# Allegro board LIDAR_READOUT_VER1_2_temp.brd
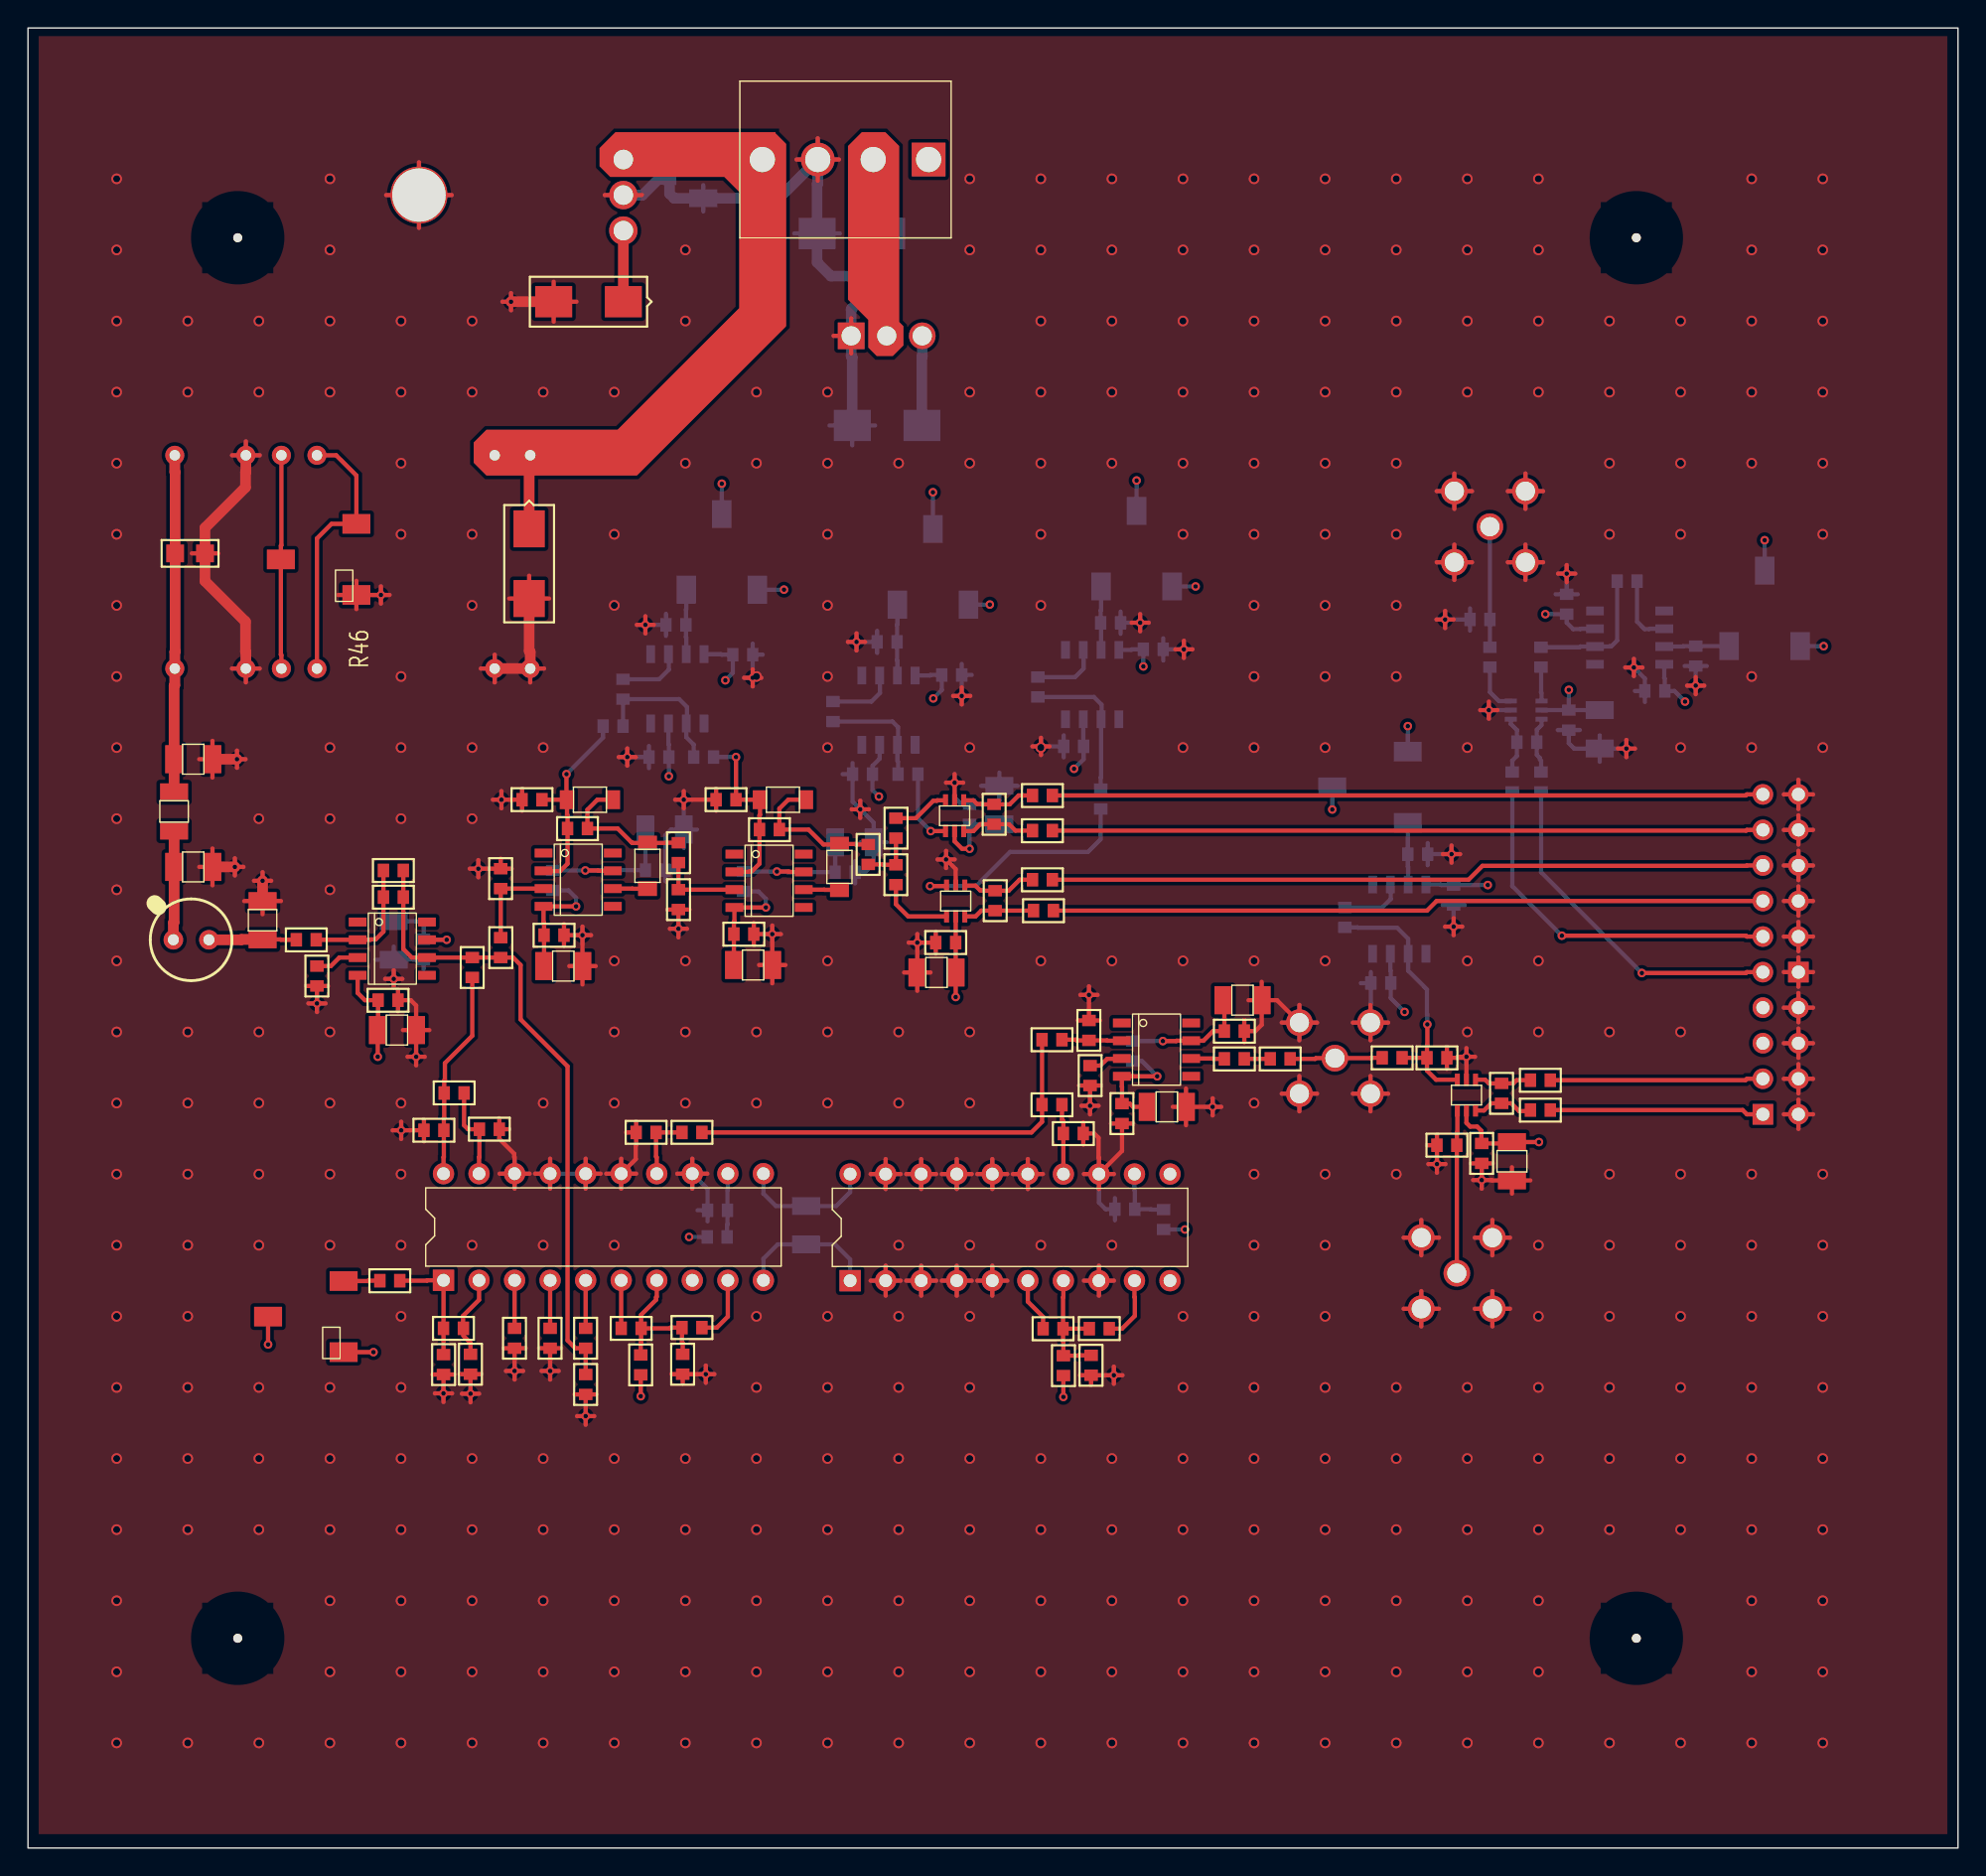
[diagram p0: board, top side]
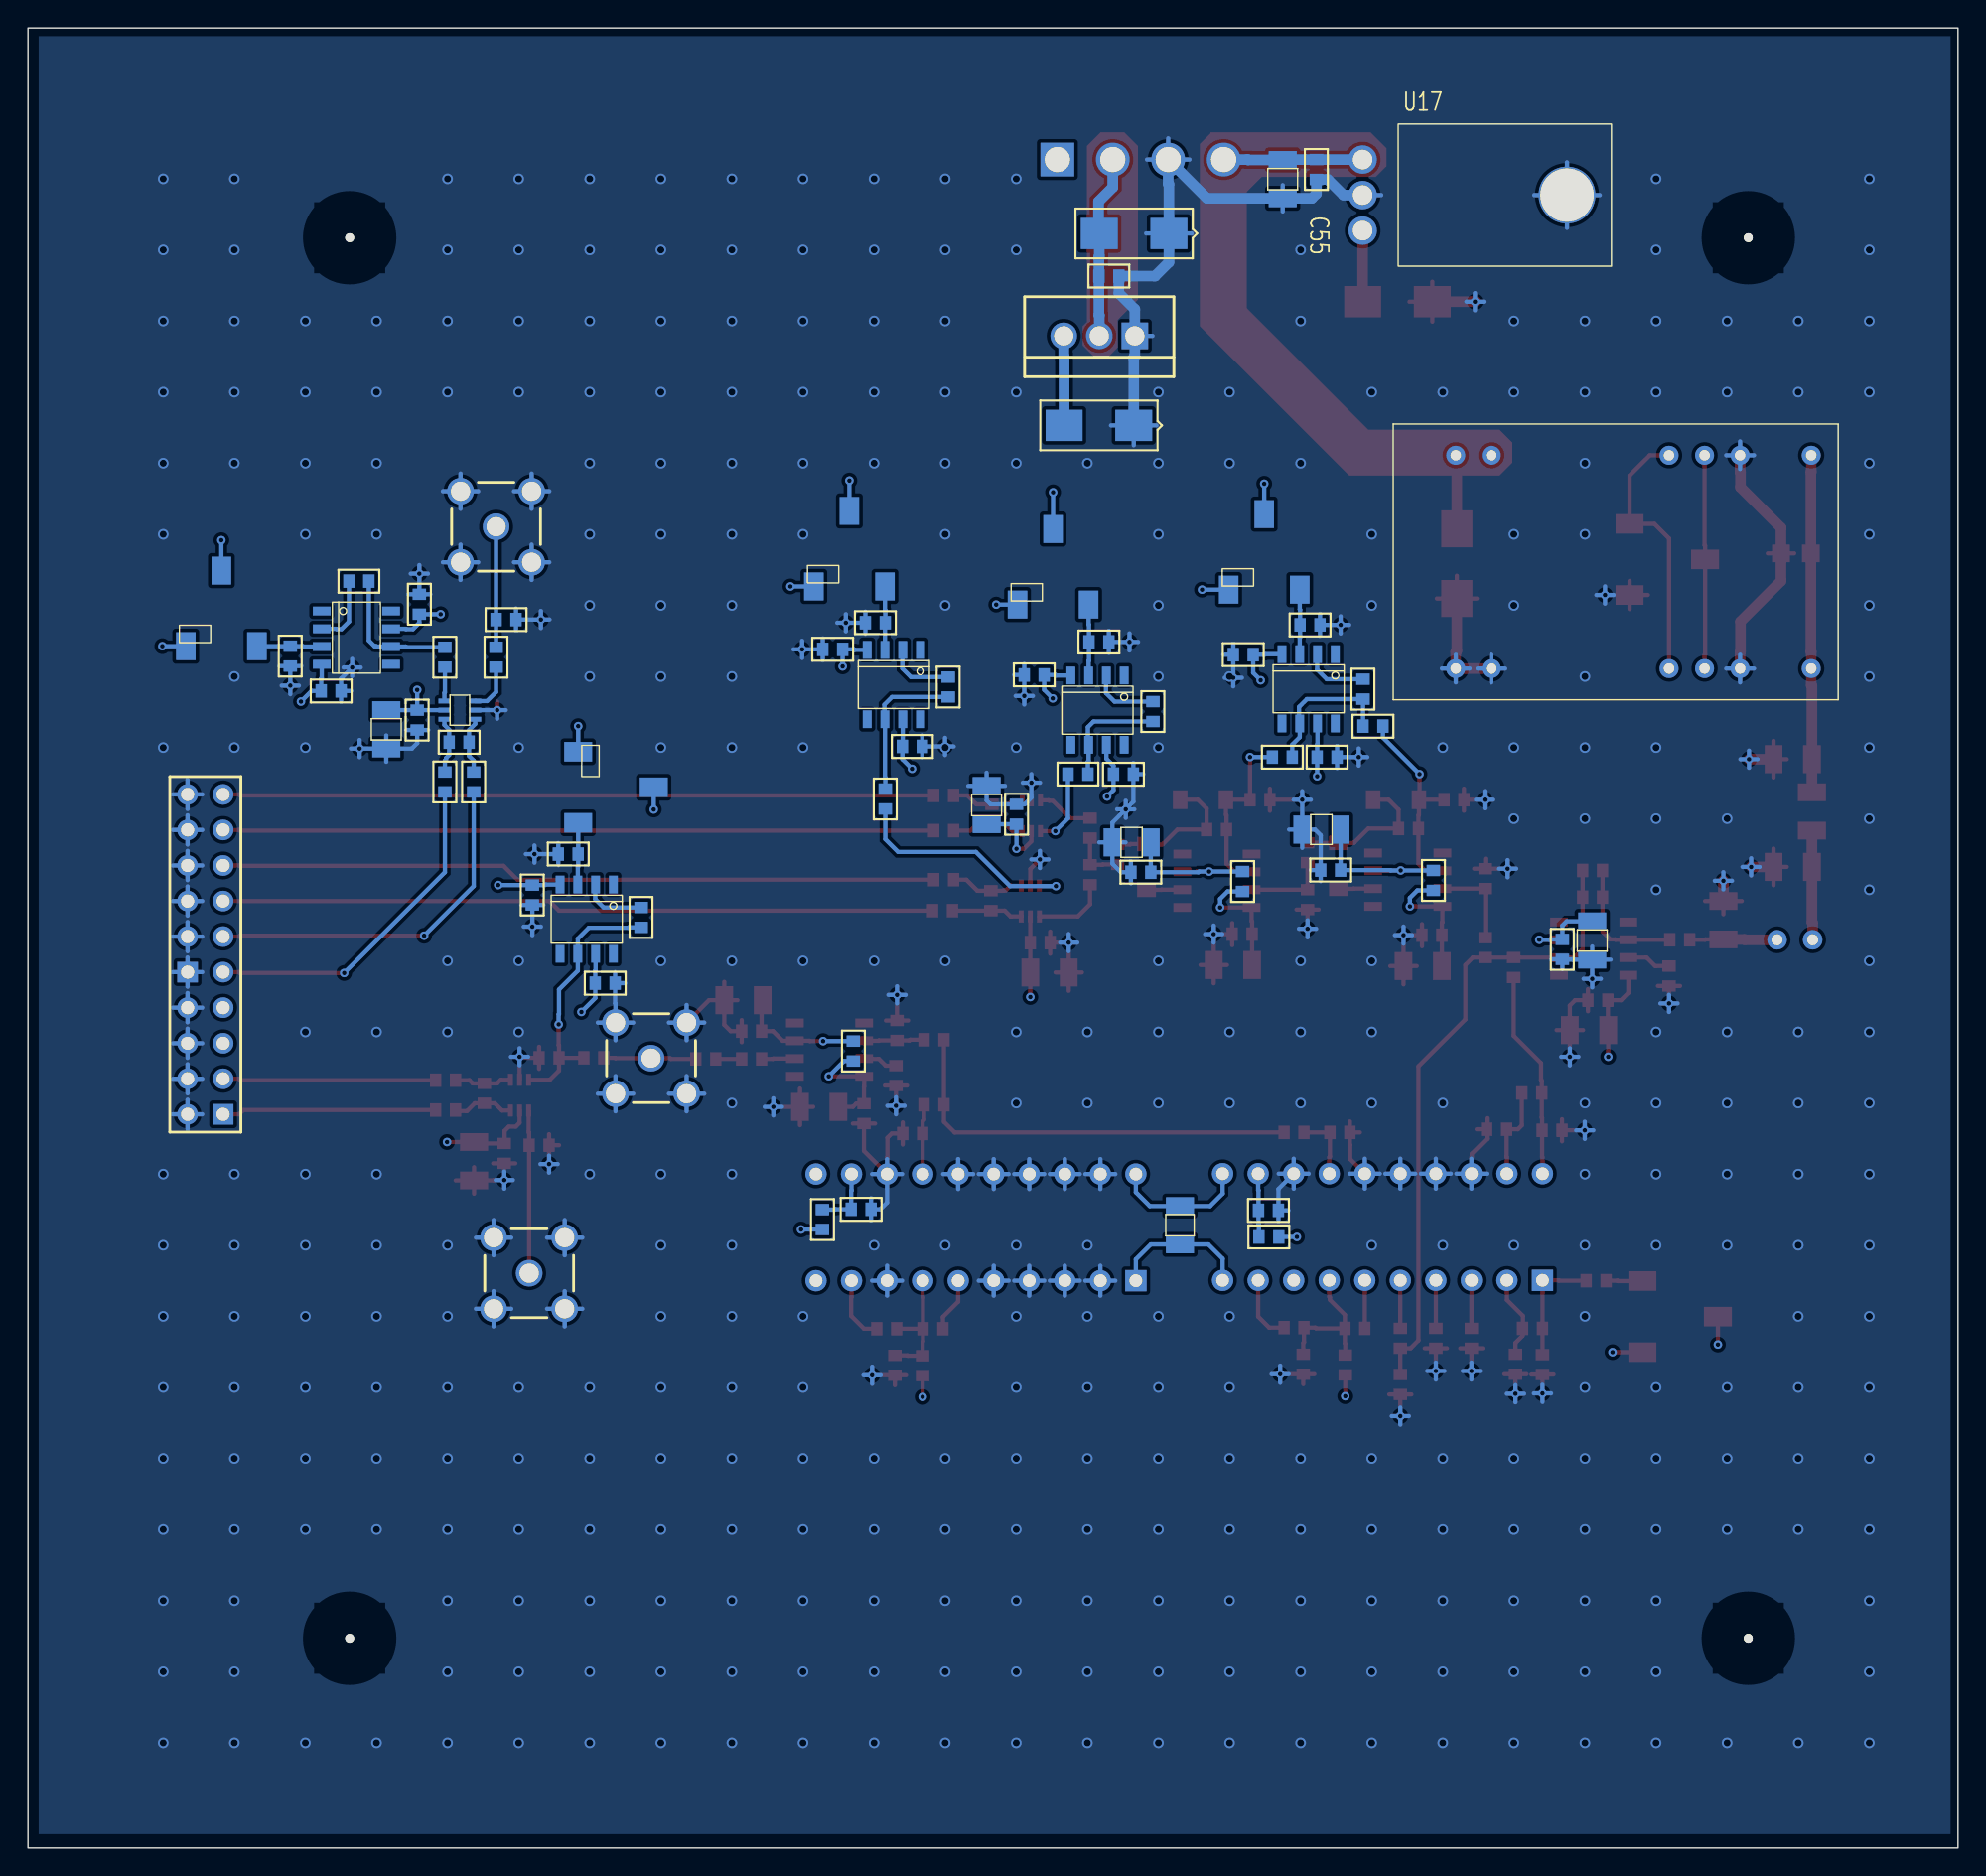
[diagram p1: board, bottom side, seen from below]

Outline 137.92 x 130.05 mm; copper layers: TOP, GROUND, POWER, BOTTOM. Coordinates in mm from the lower left corner of the outline.
Outline path: rectangle 0,0 137.92,130.05

## Design rules (mm)
constraint set DEFAULT: min track width 0.305

## Placement (name value [footprint] x y rotation side)
C1  100nF_1608  [SMC1608]  44.12 69.88 0 bottom
C2  6.8uF_3216  [SMC321612]  45.49 72.77 0 bottom
C3  100nF_1608  [SMC1608]  37.49 68.43 90 bottom
C4  100nF_1608  [SMC1608]  36.88 65.23 0 top
C5  6.8uF_3216  [SMC321612]  38.25 63.02 0 top
C6  100nF_1608  [SMC1608]  57.68 69.72 0 bottom
C7  6.8uF_3216  [SMC321612]  59.05 71.86 0 bottom
C8  0.1uF_1608  [SMC1608]  45.8 77.95 180 bottom
C9  0.1uF_1608  [SMC1608]  47.02 87.4 180 bottom
C10  100nF_1608  [SMC1608]  51.13 68.35 90 bottom
C11  100nF_1608  [SMC1608]  50.44 65.3 0 top
C12  6.8uF_3216  [SMC321612]  51.82 63.09 0 top
C13  0.1uF_1608  [SMC1608]  50.37 85.27 0 bottom
C14  0.1uF_1608  [SMC1608]  85.5 58.37 0 top
C15  6.8uF_3216  [SMC321612]  86.79 60.58 0 top
C16  0.1uF_1608  [SMC1608]  78.94 56.24 90 bottom
C17  0.1uF_1608  [SMC1608]  78.18 53.19 270 top
C18  6.8uF_3216  [SMC321612]  81.38 52.96 0 top
C19  47pF_1608  [SMC1608]  44.88 51.13 180 top
C20  47pF_1608  [SMC1608]  73.99 51.05 0 top
C21  0.1uF_1608  [SMC1608]  49.99 45.57 180 bottom
C22  0.1uF_1608  [SMC1608]  79.1 45.64 180 bottom
C23  0.1uF_1608  [SMC1608]  48.16 37.19 180 top
C24  0.1uF_1608  [SMC1608]  42.39 37.13 0 top
C25  0.1uF_1608  [SMC1608]  72.54 37.11 0 top
C26  0.1uF_1608  [SMC1608]  77.27 37.11 180 top
C27  0.1uF_1608  [SMC1608]  46.79 35.28 270 top
C28  0.1uF_1608  [SMC1608]  75.97 35.2 270 top
C29  0.1uF_1608  [SMC1608]  97.38 61.8 180 bottom
C30  0.1uF_1608  [SMC1608]  98.6 71.02 0 bottom
C31  0.1uF_1608  [SMC1608]  101.88 68.81 270 bottom
C32  0.1uF_1608  [SMC1608]  88.77 56.39 0 top
C33  10nF_1608  [SMC1608]  103.89 50.34 270 top
C34  6.8uF_3216  [SMC321612]  106.05 49.07 270 top
C35  47uF_6032  [SMC603212]  35.81 94.26 270 top
C36  4.7nF_2012_250V  [SMC2012]  10.52 92.51 0 top
C37  1.5pF_1608  [SMC1608]  25.4 69.85 0 top
C38  100nF_1608  [SMC1608]  28.27 64.92 270 bottom
C39  6.8uF_3216  [SMC321612]  26.14 64.85 270 bottom
C40  1nF_3216  [SMC321612]  11.81 77.8 0 top
C41  47nF_3216  [SMC321612]  11.81 70.1 0 top
C42  6.8uF_3216  [SMC321612]  26.37 58.45 0 top
C43  100nF_1608  [SMC1608]  25.02 60.58 0 top
C44  0.1uF_1608  [SMC1608]  60.35 76.73 180 bottom
C45  0.1uF_1608  [SMC1608]  62.1 86.18 180 bottom
C46  0.1uF_1608  [SMC1608]  65.3 83.82 0 bottom
C47  0.1uF_1608  [SMC1608]  67.28 73.15 90 bottom
C48  6.8uF_3216  [SMC321612]  69.42 74.52 90 bottom
C49  0.1uF_1608  [SMC1608]  75.44 78.71 180 bottom
C50  0.1uF_1608  [SMC1608]  76.66 87.55 0 bottom
C51  0.1uF_1608  [SMC1608]  79.71 85.65 0 bottom
C52  0.1uF_1608  [SMC1608]  66.29 64.69 180 top
C53  6.8uF_3216  [SMC321612]  64.92 62.56 180 top
C54  6.8uF_3216  [SMC321612]  48.26 119.25 270 bottom
C55  0.47uF_1608  [SMC1608]  45.85 120.65 270 bottom
C56  22uF_6032  [SMC603212]  42.55 110.49 180 top
C57  0.47uF_1608  [SMC1608]  59.97 112.32 0 bottom
C58  10uF_6032  [SMC603212]  56.39 115.37 0 bottom
C59  10uF_6032  [SMC603212]  58.9 101.65 0 bottom
C60  0.1uF_1608  [SMC1608]  109.96 88.16 90 bottom
C61  0.1uF_1608  [SMC1608]  119.18 85.88 270 bottom
C62  0.1uF_1608  [SMC1608]  116.97 82.68 180 bottom
C63  0.1uF_1608  [SMC1608]  110.11 81.31 270 bottom
C64  6.8uF_3216  [SMC321612]  112.32 79.93 270 bottom
D1  DIODE ZENER  [SMD_SOD123]  40.16 74.9 180 top
D2  SCHOTTKY_SOD123  [SMD_SOD123]  44.27 70.18 270 top
D3  DIODE ZENER  [SMD_SOD123]  53.95 74.9 180 top
D4  SCHOTTKY_SOD123  [SMD_SOD123]  57.99 70.1 270 top
D5  MTAPD-06-013  [TO46_2PIN]  10.39 64.9 0 top
J1  CON20A  [CON20A_100MIL]  123.98 52.43 90 bottom
JP1  4 HEADER  [HEADER4]  58.42 120.65 270 top
L1  CHOKE_3216  [SML3216]  55.6 44.5 270 bottom
NOREF  -  [unnamed]  114.94 115.06 0 top
NOREF#2  -  [unnamed]  114.94 14.99 0 top
NOREF#3  -  [unnamed]  14.99 115.06 0 top
NOREF#4  -  [unnamed]  14.99 14.99 0 top
R1  NC_1608  [SMR1608]  36.73 74.9 180 top
R2  249_1608  [SMR1608]  38.56 72.85 0 top
R3  16.7_1608  [SMR1608]  42.52 80.16 180 bottom
R4  0_1608  [SMR1608]  33.78 63.63 90 top
R5  NC_1608  [SMR1608]  33.78 69.98 270 top
R6  10_1608  [SMR1608]  46.48 70.41 90 top
R7  NC_1608  [SMR1608]  50.6 74.9 180 top
R8  16.7_1608  [SMR1608]  49 77.95 180 bottom
R9  249_1608  [SMR1608]  52.27 72.77 0 top
R10  200_1608  [SMR1608]  42.52 83.52 270 bottom
R11  20 kohm  [ST5EW]  52.12 89.92 90 bottom
R12  10_1608  [SMR1608]  60.05 71.7 270 top
R13  NC_1608  [SMR1608]  46.48 67.06 90 top
R14  NC_1608  [SMR1608]  75.82 59.13 270 top
R15  0_1608  [SMR1608]  72.47 57.76 0 top
R16  0_1608  [SMR1608]  75.9 54.48 90 top
R17  0_1608  [SMR1608]  85.5 56.39 0 top
R19  10_1608  [SMR1608]  48.16 51.13 180 top
R20  10_1608  [SMR1608]  72.47 53.11 0 top
R21  NC_1608  [SMR1608]  33.68 51.36 180 top
R22  10_1608  [SMR1608]  48.54 43.66 0 bottom
R23  10_1608  [SMR1608]  81.15 44.2 90 bottom
R24  NC_1608  [SMR1608]  31.17 53.95 180 top
R25  0_1608  [SMR1608]  31.75 63.63 270 top
R26  NC_1608  [SMR1608]  29.72 51.28 180 top
R27  R_1608  [SMR1608]  29.69 33.83 90 top
R28  NC_1608  [SMR1608]  29.69 37.13 0 top
R29  NC_1608  [SMR1608]  39.85 37.13 270 top
R30  4.7_1608  [SMR1608]  73.99 33.76 90 top
R31  20 kohm  [ST5EW]  22.56 35.43 180 top
R32  4.7_1608  [SMR1608]  43.79 35.23 270 top
R33  NC_1608  [SMR1608]  25.15 40.54 0 top
R34  NC_1608  [SMR1608]  31.62 35.28 270 top
R35  NC_1608  [SMR1608]  34.77 37.13 270 top
R36  NC_1608  [SMR1608]  37.31 37.13 270 top
R37  NC_1608  [SMR1608]  39.85 33.83 270 top
R38  200_1608  [SMR1608]  94.11 67.21 270 bottom
R39  20 kohm  [ST5EW]  98.6 78.33 180 bottom
R40  200_1608  [SMR1608]  96.77 56.46 0 top
R41  0_1608  [SMR1608]  107.37 54.86 0 top
R42  50_1608  [SMR1608]  99.97 56.46 0 top
R43  100_1608  [SMR1608]  105.31 54.64 270 top
R44  0_1608  [SMR1608]  107.37 52.73 0 top
R45  50_1608  [SMR1608]  102.11 50.22 180 top
R46  5 kohm  [ST5EW]  23.47 89.53 180 top
R47  20k_3216  [SMR3216]  10.44 74.07 270 top
R48  100_1608  [SMR1608]  25.4 67.94 0 top
R49  0_1608  [SMR1608]  19.18 64.9 0 top
R50  50_1608  [SMR1608]  20.65 63.02 270 top
R51  NC_3216  [SMR3216]  16.76 66.29 90 top
R52  200_1608  [SMR1608]  57.53 81.92 270 bottom
R53  0_1608  [SMR1608]  62.03 72.16 90 top
R54  0_1608  [SMR1608]  71.78 75.21 0 top
R55  20 kohm  [ST5EW]  67.21 88.85 90 bottom
R56  0_1608  [SMR1608]  62.18 76.73 0 bottom
R57  100_1608  [SMR1608]  69.04 73.15 90 top
R58  0_1608  [SMR1608]  71.78 72.69 0 top
R59  0_1608  [SMR1608]  71.78 69.19 0 top
R60  200_1608  [SMR1608]  72.16 83.67 270 bottom
R61  20 kohm  [ST5EW]  81.76 90.14 90 bottom
R62  100_1608  [SMR1608]  69.11 66.98 90 top
R63  0_1608  [SMR1608]  76.66 75.67 270 bottom
R64  0_1608  [SMR1608]  62.03 70.26 270 top
R65  0_1608  [SMR1608]  71.86 66.98 0 top
R66  200_1608  [SMR1608]  114.99 90.53 180 bottom
R67  20 kohm  [ST5EW]  126.64 85.88 90 bottom
R68  0_1608  [SMR1608]  108.13 85.8 270 bottom
R69  0_1608  [SMR1608]  106.07 76.89 270 bottom
R70  100_1608  [SMR1608]  107.82 79.02 180 bottom
R71  0_1608  [SMR1608]  108.13 76.89 270 bottom
R72  0_1608  [SMR1608]  104.47 85.8 270 bottom
R73  50_1608  [SMR1608]  104.47 87.78 180 bottom
U1  OPA695  [SOIC8]  39.32 69.19 0 top
U2  OPA695  [SOIC8]  52.96 69.11 0 top
U3  OPA277  [SOIC8]  46.41 82.83 270 bottom
U4  LMH6704  [SOIC8]  80.64 57.05 0 top
U5  AD641  [DIP20_3]  29.69 40.56 90 top
U6  AD641  [DIP20_3]  58.75 40.54 90 top
U7  OPA277  [SOIC8]  97.99 66.37 270 bottom
U8  TLV3604  [SC70_6PIN]  102.79 53.8 270 top
U9  SMA_CON  [RFSMAV]  93.4 56.44 180 bottom
U10  SMA_CON  [RFSMAV]  102.11 41.07 180 bottom
U11  R12_150B  [R12_150]  24.46 91.9 90 bottom
U12  OPA657  [SOIC8]  26.04 64.26 0 top
U13  OPA277  [SOIC8]  61.49 81.31 270 bottom
U14  TLV3604  [SC70_6PIN]  66.22 73.76 270 top
U15  OPA277  [SOIC8]  76.05 83.13 270 bottom
U16  TLV3604  [SC70_6PIN]  66.29 67.67 270 top
U17  LM2940  [LM2940_TO220]  42.55 120.65 270 bottom
U18  LM2990  [LM2990_TO220AB]  58.83 108.05 0 bottom
U19  OPA277  [SOIC8]  114.45 86.49 180 bottom
U20  TLV3604  [SC70_6PIN]  107.06 81.31 0 bottom
U21  SMA_CON  [RFSMAV]  104.47 94.41 180 bottom

## Library data of the parts
C1-C14 C16 C17 C19-C34 C44-C53 C55 C57 C60-C64 = CAP_2012
C15 C18 C39-C42 C54 = CAP_3216
C35 C56 C58 C59 = CAP POL
C36 = CAP_5750_250V
C37 C38 C43 = CAP_1608
D1 D3 = DIODE ZENER
D2 D4 = DIODE SCHOTTKY
D5 = MTAPD-06-013
J1 = CON20A
JP1 = 4 HEADER_0
L1 = CHOKE
R1-R10 R12-R17 R19-R30 R32-R38 R40-R45 R48-R50 R52-R54 R56-R60 R62-R66 R68-R73 = R_1608
R11 R31 R39 R46 R55 R61 R67 = RESISTOR VAR
R47 R51 = R_3216
U1 U2 = OPA695: Tolerance: ***; User Part Number: ***
U3 U7 U13 U15 U19 = OPA277: Tolerance: ***; User Part Number: ***
U4 = LMH6704: Tolerance: ***; User Part Number: ***
U5 U6 = AD641: Tolerance: ***; User Part Number: ***
U8 U14 U16 U20 = TLV3604
U9 U10 U21 = SMA_CON
U11 = R12_150B
U12 = OPA657: Tolerance: ***; User Part Number: ***
U17 = LM2940
U18 = LM2990

## Footprints (pads in the part's own frame, mm; a bottom-side part is the same pattern mirrored in y, then rotated)
CON20A_100MIL
  rect 1.473x1.473 hole 0.94: 1(0,0) 10(10.16,2.54)
  round 1.473 hole 0.94: 2(0,2.54) 3(2.54,0) 4(2.54,2.54) 5(5.08,0) 6(5.08,2.54) 7(7.62,0) 8(7.62,2.54) 9(10.16,0) 11(12.7,0) 12(12.7,2.54) 13(15.24,0) 14(15.24,2.54) 15(17.78,0) 16(17.78,2.54) 17(20.32,0) 18(20.32,2.54) 19(22.86,0) 20(22.86,2.54)
DIP20_3
  rect 1.524x1.524 hole 0.914: 1(0,0)
  round 1.524 hole 0.914: 2(0,-2.54) 3(0,-5.08) 4(0,-7.62) 5(0,-10.16) 6(0,-12.7) 7(0,-15.24) 8(0,-17.78) 9(0,-20.32) 10(0,-22.86) 11(7.62,-22.86) 12(7.62,-20.32) 13(7.62,-17.78) 14(7.62,-15.24) 15(7.62,-12.7) 16(7.62,-10.16) 17(7.62,-7.62) 18(7.62,-5.08) 19(7.62,-2.54) 20(7.62,0)
HEADER4
  rect 2.41x2.41 hole 1.801: 1(0,5.941)
  round 2.41 hole 1.801: 2(0,1.981) 3(0,-1.981) 4(0,-5.941)
LM2940_TO220
  round 2.032 hole 1.397: 1(0,0) 2(2.54,0) 3(5.08,0)
  round 4.064 hole 3.81: 4(2.54,14.605)
LM2990_TO220AB
  rect 1.905x1.905 hole 1.372: 1(0,0)
  round 1.905 hole 1.372: 2(2.54,0) 3(5.08,0)
R12_150
  round 1.359 hole 0.749: 2(-7.62,11.43) 3(-7.62,8.89) 8(-7.62,-3.81) 9(-7.62,-6.35) 10(-7.62,-8.89) 12(-7.62,-13.97) 13(7.62,-13.97) 15(7.62,-8.89) 16(7.62,-6.35) 17(7.62,-3.81) 22(7.62,8.89) 23(7.62,11.43)
RFSMAV
  round 1.905 hole 1.372: 1(0,0) 2(-2.54,-2.54) 3(2.54,-2.54) 4(2.54,2.54) 5(-2.54,2.54)
SC70_6PIN
  rect 0.864x0.356 smd: 1(-1.1,0.65) 2(-1.1,0) 3(-1.1,-0.65) 4(1.1,-0.65) 5(1.1,0) 6(1.1,0.65)
SMC1608
  rect 0.813x0.965 smd: 1(0,0) 2(1.422,0)
SMC2012
  rect 1.27x1.27 smd: 1(0,0) 2(2.134,0)
SMC321612
  rect 1.27x2.007 smd: 1(-1.372,0) 2(1.372,0)
SMC603212
  rect 2.642x2.235 smd: 1(0,0) 2(4.978,0)
SMD_SOD123
  rect 1.036x1.346 smd: 1(-1.636,0) 2(1.636,0)
SML3216
  rect 1.27x2.007 smd: 1(-1.372,0) 2(1.372,0)
SMR1608
  rect 0.813x0.965 smd: 1(0,0) 2(1.422,0)
SMR3216
  rect 1.27x2.007 smd: 1(-1.372,0) 2(1.372,0)
SOIC8
  rect 1.27x0.635 smd: 1(-2.477,1.905) 2(-2.477,0.635) 3(-2.477,-0.635) 4(-2.477,-1.905) 5(2.477,-1.905) 6(2.477,-0.635) 7(2.477,0.635) 8(2.477,1.905)
ST5EW
  rect 1.999x1.4 smd: 1(0,0) 2(0,-5.08) 3(5.397,-2.54)
TO46_2PIN
  round 1.397 hole 0.787: 1(0,0) 2(2.54,0)
unnamed
  round 0.635 hole 5.999 unplated: (0,0)

## Nets
12V: C35.1 C54.1 C55.1 JP1.4 U11.22 U11.23 U17.1
-12V: C57.2 C58.2 JP1.2 U18.2
GND: C1.2 C2.2 C4.2 C5.2 C6.2 C7.2 C8.2 C9.2 C11.2 C12.2 C13.2 C14.2 C15.2 C17.2 C18.2 C19.2 C20.2 C21.2 C22.2 C27.2 C28.2 C29.2 C30.2 C31.2 C33.2 C34.2 C35.2 C36.2 C38.2 C39.2 C40.2 C41.2 C42.2 C43.2 C44.2 C45.2 C46.2 C47.2 C48.2 C49.2 C50.2 C51.2 C52.2 C53.2 C54.2 C55.2 C56.2 C57.1 C58.1 C59.1 C60.2 C61.2 C62.2 C63.2 C64.2 J1.2 J1.4 J1.6 J1.8 J1.10 J1.12 J1.14 J1.16 J1.18 J1.20 JP1.3 R1.2 R5.1 R7.2 R13.1 R14.1 R16.1 R21.1 R26.2 R27.1 R34.2 R35.2 R36.2 R37.2 R42.2 R45.2 R46.1 R50.2 R51.2 R73.2 U5.13 U5.15(RG2) U5.16 U5.17 U5.18 U6.2 U6.3 U6.4 U6.5 U6.8 U6.13 U6.15(RG2) U6.16 U6.17 U6.18 U6.19 U8.2(VEE) U9.2 U9.3 U9.4 U9.5 U10.2 U10.3 U10.4 U10.5 U11.2 U11.3 U11.10 U11.15 U14.2(VEE) U16.2(VEE) U17.2 U17.4 U18.1 U20.2(VEE) U21.2 U21.3 U21.4 U21.5
+VS_5V: C1.1 C2.1 C3.2 C6.1 C7.1 C8.1 C10.2 C14.1 C15.1 C16.2 C29.1 C33.1 C34.1 C38.1 C39.1 C44.1 C47.1 C48.1 C49.1 C52.1 C53.1 C56.1 C60.1 C63.1 C64.1 R11.1 R22.1 R23.1 R31.1 R39.1 R55.1 R61.1 R67.1 U1.7 U2.7 U3.7 U4.7 U7.7 U8.5 U12.7 U13.7 U14.5 U15.7 U16.5 U17.3(OUT) U19.7 U20.5
-VS_5V: C3.1 C4.1 C5.1 C10.1 C11.1 C12.1 C13.1 C16.1 C17.1 C18.1 C31.1 C42.1 C43.1 C46.1 C51.1 C59.2 C62.1 R11.3 R30.1 R31.3 R32.2 R39.3 R55.3 R61.3 R67.3 U1.4 U2.4 U3.4 U4.4 U7.4 U12.4 U13.4 U15.4 U18.3(OUT) U19.4
DUALAMP_OUT: R12.2 R53.1 R64.1
FALL_LED_N: J1.13 R65.2
FALL_LED_P: J1.15 R59.2
LOGAMP_OUT: C32.1 R17.2
PD_SIG: D5.2 R49.1 R51.1
RISE_LED_N: J1.17 R58.2
RISE_LED_P: J1.19 R54.2
TIA_OUT: C37.2 R4.1 R25.1 R29.2 R37.1 R48.2 U12.6(OUT)
TRIGGER_N: J1.9 R71.2
TRIGGER_P: J1.11 R69.2
VPD_BIAS: C36.1 C40.1 R47.1 U11.12 U11.13
N02448: C41.1 D5.1(CATHODE) R47.2
N06306: C37.1 R48.1 R49.2 U12.2
N06673: R50.1 U12.3
N07370: R24.2 R25.2 R26.1 U5.20
N07374: R21.2 R24.1 U5.19
N07386: R27.2 R28.1 R33.2 U5.1
N07390: R28.2 R34.1 U5.2
N07414: R35.1 U5.3
N07418: R36.1 U5.4
N08194: R29.1 U5.5
N08685: C24.1 U5.6
N08698: C23.2 C24.2 C27.1 R32.1 U5.7
N08811: C23.1 U5.9
N10504: R31.2(WIPER) R33.1
N10575: C19.1 R19.2 U5.14
N10750: C21.1 R22.2 U5.12
N11884: L1.2 U5.10 U6.1
N11896: L1.1 U5.11 U6.20
N13370: C20.1 R20.2 U6.14
N13878: C22.1 R23.2 U6.12
N14813: C25.1 U6.6
N14817: C25.2 C26.2 C28.1 R30.2 U6.7
N14841: C26.1 U6.9
N18619: R15.1 R19.1 R20.1
N18646: R14.2 R15.2 U4.2
N18650: R16.2 U4.3
N21415: C30.1 R39.2(WIPER) U7.3
N21464: R38.2 R40.2 R42.1 U7.6 U8.3
N21476: R38.1 U7.2
N21515: C32.2 R40.1 U9.1(SIG)
N22112: R41.1 R43.1 U8.1
N22127: R43.2 R44.1 U8.6
N22204: R45.1 U8.4 U10.1(SIG)
N23346: J1.1 R44.2
N23373: J1.3 R41.2
N26081: R4.2 R5.2 U1.3
N26158: R6.1 R13.2 U2.3
N26293: D1.2 R1.1 R2.1 R3.2 U1.2
N26337: D1.1(CATHODE) D2.1 R2.2 R6.2
N26524: D3.2 R7.1 R8.1 R9.1 U2.2
N26546: D3.1(CATHODE) D4.1 R9.2 R12.1
N27092: R17.1 U4.6(OUT)
N29940: R10.1 U3.2
N29948: R3.1 R8.2 R10.2 U3.6
N30038: C9.1 R11.2(WIPER) U3.3
N31016: D2.2(CATHODE) U1.6(OUT)
N31106: D4.2(CATHODE) U2.6(OUT)
N34481: R46.2(WIPER) U11.8 U11.17
N34555: R46.3 U11.9 U11.16(VREF1)
N35748: C45.1 R55.2(WIPER) U13.3
N35766: R52.1 U13.2
N35782: R52.2 R56.1 U13.6
N35880: C50.1 R61.2(WIPER) U15.3
N35901: R60.1 U15.2
N35913: R60.2 R63.1 U15.6
N36382: R62.1 R65.1 U16.6
N36394: R59.1 R62.2 U16.1
N36406: R57.1 R58.1 U14.6
N36421: R54.1 R57.2 U14.1
N36433: R53.2 U14.3
N36440: R64.2 U16.4
N36471: R56.2 U14.4
N36489: R63.2 U16.3
N41077: R66.1 U19.2
N41085: R66.2 R68.1 U19.6
N41191: C61.1 R67.2(WIPER) U19.3
N41211: R68.2 U20.4
N41529: R72.1 R73.1 U21.1(SIG)
N41622: R72.2 U20.3
N41672: R69.1 R70.2 U20.1
N41690: R70.1 R71.1 U20.6

Pads without a net: J1 5 7; JP1 1; U1 1 5 8; U2 1 5 8; U3 1 5 8; U4 1 5 8; U5 8; U6 10 11; U7 1 5 8; U12 1 5 8; U13 1 5 8; U15 1 5 8; U19 1 5 8

## Via types
v1: diameter 0.61, hole 0.33, TOP to BOTTOM, 93 vias
v2: diameter 0.762, hole 0.508, TOP to BOTTOM, 357 vias

## Routing (per net, layer and track width the routed paths; a pad name or vN(x,y) marks a point on that pad's centre or on a via; arc(x,y) is an arc through that point)
12V: length 49.7
  TOP w0.762: U11.23 42.6,99.52 52.48,109.4 JP1.4 ; U11.23 35.89,98.33 35.81,98.25 C35.1 ; U11.23 U11.22
  BOTTOM w0.762: JP1.4 50.76,120.65 50.74,120.62 C54.1 48.23,120.65 C55.1 U17.1
-12V: length 13.1
  BOTTOM w0.762: U18.2 61.37,109.51 61.39,109.54 C57.2 61.39,113.72 61.37,113.74 C58.2 61.42,115.42 61.42,117.65 60.4,118.67 JP1.2
GND: length 1279.1
  TOP w0.305: J1.14 126.52,68.71 ; J1.14 127.56,67.67 ; J1.14 126.52,66.62 ; J1.14 125.47,67.67 ; 105.75,91.87 U21.2 ; U21.2 108.27,91.87 ; U21.2 107.01,90.61 ; U21.2 107.01,93.13 ; C34.2 107.36,47.7 ; C34.2 106.05,48.64 ; C34.2 104.62,47.7 104.6,47.73 v1(103.89,47.73) ; C34.2 106.05,46.76 ; C43.2 26.44,61.37 ; C43.2 27.36,60.58 27.74,60.2 C42.2 ; C43.2 26.44,59.79 ; 37.31,47.11 U5.17 ; U5.17 37.31,49.25 ; U5.17 36.24,48.18 ; JP1.3 56.44,122.16 ; JP1.3 56.44,119.14 ; JP1.3 57.95,120.65 ; JP1.3 54.92,120.65 ; v1(59.21,86.18) 59.82,86.18 ; v1(59.21,86.18) 59.21,85.57 ; v1(59.21,86.18) 59.21,86.79 ; v1(59.21,86.18) 58.6,86.18 ; 100.07,48.87 v1(100.69,48.87) ; v1(100.69,48.87) 100.69,48.26 ; v1(100.69,48.87) 101.3,48.87 ; v1(100.69,48.87) R45.2 ; 42.39,47.11 U5.15 ; U5.15 42.39,49.25 ; U5.15 43.43,49.23 43.43,50.22 43.46,50.24 C19.2 ; U5.15 41.32,48.18 ; U5.15 43.46,48.18 ; 58.83,106.79 U18.1 ; U18.1 58.83,109.31 ; U18.1 57.57,108.05 ; 33.91,110.49 v1(34.52,110.49) ; v1(34.52,110.49) 34.52,111.1 ; v1(34.52,110.49) 34.52,109.88 ; 68.91,39.47 U6.5 ; U6.5 69.98,40.54 ; U6.5 68.91,41.61 ; U6.5 67.84,40.54 ; 29.69,31.87 v1(29.69,32.49) ; v1(29.69,32.49) 30.3,32.49 ; v1(29.69,32.49) R27.1 ; v1(29.69,32.49) 29.08,32.49 ; C17.2 78.97,51.77 ; C17.2 78.18,49.81 U6.13 ; C17.2 77.39,51.77 ; 101.88,65.22 v1(101.88,65.84) ; v1(101.88,65.84) 102.49,65.84 ; v1(101.88,65.84) 101.88,66.45 ; v1(101.88,65.84) 101.27,65.84 ; R45.2 100.69,51.01 ; R45.2 99.97,50.22 ; 101.11,71.02 v1(101.73,71.02) ; v1(101.73,71.02) 102.34,71.02 ; v1(101.73,71.02) 101.73,70.41 ; v1(101.73,71.02) 101.73,71.63 ; U5.16 39.85,49.25 ; U5.16 39.85,47.11 ; U5.16 40.92,48.18 ; 65.3,48.16 U6.17 ; U6.17 66.37,47.09 ; U6.17 66.37,49.23 ; U6.17 67.44,48.16 ; C35.2 35.81,90.91 ; C35.2 34.39,89.28 ; C35.2 37.24,89.28 ; 126.52,71.7 J1.18 ; J1.18 126.52,73.79 ; J1.18 125.47,72.75 ; J1.18 127.56,72.75 ; U9.5 97.2,58.98 ; U9.5 95.94,60.24 ; U9.5 95.94,57.72 ; U9.5 94.68,58.98 ; 15.45,67.67 R51.2 ; R51.2 18.07,67.67 ; R51.2 16.76,66.72 ; R34.2 32.41,33.86 ; R34.2 30.83,33.86 ; R34.2 v1(31.62,32.46) ; 13.59,92.51 C36.2 11.71,92.51 ; U6.15 72.52,48.16 ; U6.15 71.45,47.09 ; U6.15 71.45,49.23 ; U6.15 70.38,48.16 ; C19.2 43.46,51.92 ; C19.2 42.75,51.13 ; R14.1 v1(75.82,60.96) ; R14.1 76.61,59.13 ; R14.1 75.03,59.13 ; v1(75.82,60.96) 76.43,60.96 ; v1(75.82,60.96) 75.82,61.57 ; v1(75.82,60.96) 75.21,60.96 ; 62.76,48.16 U6.18 ; U6.18 64.9,48.16 ; U6.18 63.83,47.09 ; U6.18 63.83,49.23 ; 13.18,76.49 C40.2 ; C40.2 13.18,79.11 ; C40.2 12.24,77.8 ; R26.2 28.3,52.07 ; R26.2 v1(26.67,51.28) ; R26.2 28.3,50.49 ; 26.14,61.49 v1(26.14,62.1) ; v1(26.14,62.1) 26.75,62.1 ; v1(26.14,62.1) 26.14,62.72 ; v1(26.14,62.1) 25.52,62.1 ; 68.91,47.09 U6.16 ; U6.16 68.91,49.23 ; U6.16 69.98,48.16 ; U6.16 67.84,48.16 ; 41.22,118.11 U17.2 43.87,118.11 ; v1(65.61,70.64) 66.22,70.64 ; v1(65.61,70.64) 66.29,69.95 U16.2 ; v1(65.61,70.64) 65.61,70.03 ; v1(65.61,70.64) 65,70.64 ; v1(65.61,70.64) 65.61,71.25 ; C14.2 87.71,58.37 88.16,58.83 C15.2 ; C14.2 86.92,57.58 ; C14.2 86.92,59.16 ; 71.78,78.71 v1(72.39,78.71) ; v1(72.39,78.71) 73,78.71 ; v1(72.39,78.71) 72.39,78.1 ; v1(72.39,78.71) 72.39,79.33 ; J1.8 126.52,61.09 ; J1.8 127.56,60.05 ; J1.8 125.47,60.05 ; J1.8 126.52,59 ; 103.39,38.53 U10.2 ; U10.2 105.91,38.53 ; U10.2 104.65,37.27 ; U10.2 104.65,39.79 ; v1(14.94,77.8) 15.55,77.8 ; v1(14.94,77.8) 14.94,77.19 ; v1(14.94,77.8) 14.94,78.41 ; 38.68,63.02 C5.2 ; C5.2 40.57,63.02 ; C5.2 v1(39.62,65.23) ; C5.2 39.62,61.71 ; 109.34,91.06 v1(109.96,91.06) ; v1(109.96,91.06) 110.57,91.06 ; v1(109.96,91.06) 109.96,91.67 ; v1(109.96,91.06) 109.96,90.45 ; v1(46.48,65.68) 47.09,65.68 ; v1(46.48,65.68) 45.87,65.68 ; v1(46.48,65.68) 46.48,65.07 ; v1(46.48,65.68) R13.1 ; 34.77,33.47 v1(34.77,34.09) ; v1(34.77,34.09) R35.2 ; v1(34.77,34.09) 35.38,34.09 ; v1(34.77,34.09) 34.16,34.09 ; J1.16 126.52,71.25 ; J1.16 127.56,70.21 ; J1.16 126.52,69.16 ; J1.16 125.47,70.21 ; U6.8 76.53,41.61 ; U6.8 76.53,39.47 ; U6.8 77.6,40.54 ; U6.8 75.46,40.54 ; v1(51.79,83.62) 51.79,84.23 ; v1(51.79,83.62) 51.18,83.62 ; v1(51.79,83.62) 52.4,83.62 ; v1(51.79,83.62) 51.79,83 ; U21.3 103.19,91.87 ; U21.3 100.67,91.87 ; U21.3 101.93,93.13 ; U21.3 101.93,90.61 ; 65.61,76.12 v1(66.22,76.12) ; v1(66.22,76.12) 66.83,76.12 ; v1(66.22,76.12) U14.2 ; v1(66.22,76.12) 66.22,76.74 ; R7.2 49.17,75.69 ; R7.2 49.17,74.11 ; R7.2 v1(46.86,74.9) ; 62.61,62.56 C53.2 ; C53.2 63.55,61.25 ; C53.2 64.49,62.56 ; C53.2 v1(63.55,64.69) ; v1(101.27,87.78) 101.88,87.78 ; v1(101.27,87.78) 100.66,87.78 ; v1(101.27,87.78) 101.27,87.17 ; v1(101.27,87.78) 101.27,88.39 ; 28.9,33.83 R27.1 ; R27.1 30.48,33.83 ; 99.57,37.27 U10.3 ; U10.3 98.31,38.53 ; U10.3 99.57,39.79 ; U10.3 100.83,38.53 ; C18.2 82.75,54.27 ; C18.2 v1(84.66,52.96) ; C18.2 82.75,51.65 ; C18.2 81.81,52.96 ; v1(42.82,77.95) 42.82,78.56 ; v1(42.82,77.95) 43.44,77.95 ; v1(42.82,77.95) 42.82,77.34 ; v1(42.82,77.95) 42.21,77.95 ; U5.18 35.84,48.18 ; U5.18 34.77,49.35 34.75,49.38 34.75,49.61 33.68,50.67 R21.1 ; U5.18 34.77,47.11 ; U5.18 33.7,48.18 ; C42.2 v1(27.74,56.54) ; C42.2 28.68,58.45 ; C42.2 26.79,58.45 ; v1(27.74,56.54) 27.12,56.54 ; v1(27.74,56.54) 27.74,55.93 ; v1(27.74,56.54) 28.35,56.54 ; U8.2 v1(102.79,56.54) ; v1(102.79,56.54) 102.79,57.15 ; v1(102.79,56.54) 102.18,56.54 ; v1(102.79,56.54) 102.72,56.46 R42.2 ; v1(102.79,56.54) 103.41,56.54 ; U9.3 90.86,55.16 ; U9.3 90.86,52.64 ; U9.3 89.6,53.9 ; U9.3 92.12,53.9 ; v1(84.66,52.96) 85.27,52.96 ; v1(84.66,52.96) 84.66,52.35 ; v1(84.66,52.96) 84.66,53.57 ; U11.15 16.56,99.52 ; U11.15 14.58,99.52 ; U11.15 15.57,100.51 ; U9.2 97.2,53.9 ; U9.2 95.94,55.16 ; U9.2 95.94,52.64 ; U9.2 94.68,53.9 ; R50.2 21.44,61.59 ; R50.2 v1(20.65,60.35) ; R50.2 19.86,61.59 ; C33.2 104.68,48.92 ; C33.2 v1(103.89,47.73) ; C33.2 103.1,48.92 ; v1(16.76,69.11) 17.38,69.11 ; v1(16.76,69.11) 16.15,69.11 ; v1(16.76,69.11) 16.76,69.73 ; 38.3,64.44 C4.2 ; C4.2 v1(39.62,65.23) ; C4.2 38.3,66.02 ; 65.3,40.54 U6.4 ; U6.4 67.44,40.54 ; U6.4 66.37,41.61 ; U6.4 66.37,39.47 ; R1.2 35.31,75.69 ; R1.2 v1(33.83,74.9) ; R1.2 35.31,74.11 ; 33.35,83.29 U11.3 ; U11.3 32.36,84.28 ; U11.3 33.35,85.27 ; 31.62,31.85 v1(31.62,32.46) ; v1(31.62,32.46) 31.01,32.46 ; v1(31.62,32.46) 32.24,32.46 ; C52.2 64.87,65.48 ; C52.2 v1(63.55,64.69) ; C52.2 64.87,63.9 ; 61.29,47.09 U6.19 ; U6.19 60.22,48.16 ; U6.19 61.29,49.23 ; U6.19 62.36,48.16 ; 104.39,80.69 v1(104.39,81.31) ; v1(104.39,81.31) 105.01,81.31 ; v1(104.39,81.31) 103.78,81.31 ; v1(104.39,81.31) 104.39,81.92 ; U9.4 90.86,60.24 ; U9.4 90.86,57.72 ; U9.4 89.26,60.58 C15.2 ; U9.4 92.12,58.98 ; U9.4 89.6,58.98 ; 26.06,51.28 v1(26.67,51.28) ; v1(26.67,51.28) 26.67,50.67 ; v1(26.67,51.28) 26.67,51.89 ; 14.78,69.49 v1(14.78,70.1) ; v1(14.78,70.1) 14.78,70.72 ; v1(14.78,70.1) 15.39,70.1 ; 25.6,118.11 U17.4 ; U17.4 27.94,115.77 ; U17.4 27.94,120.45 ; U17.4 30.28,118.11 ; J1.4 127.56,54.97 ; J1.4 126.52,53.92 ; J1.4 126.52,56.01 ; J1.4 125.47,54.97 ; J1.6 126.52,58.55 ; J1.6 127.56,57.51 ; J1.6 125.47,57.51 ; J1.6 126.52,56.46 ; U6.13 77.6,48.16 ; U6.13 76.53,49.33 76.5,49.35 76.5,50.75 76.2,51.05 C20.2 ; U6.13 75.46,48.16 ; U6.13 76.53,47.09 ; v1(79.48,87.55) 79.48,88.17 ; v1(79.48,87.55) 78.86,87.55 ; v1(79.48,87.55) 80.09,87.55 ; v1(79.48,87.55) 79.48,86.94 ; 46.25,74.9 v1(46.86,74.9) ; v1(46.86,74.9) 46.86,74.29 ; v1(46.86,74.9) 46.86,75.52 ; R42.2 101.4,57.25 ; R42.2 101.4,55.67 ; v1(53.19,65.3) 53.19,65.92 ; v1(53.19,65.3) C11.2 ; v1(53.19,65.3) 53.8,65.3 ; v1(53.19,65.3) C12.2 ; U11.10 16.56,84.28 ; U11.10 14.58,84.28 ; U11.10 15.57,83.29 ; v1(39.85,30.86) 40.46,30.86 ; v1(39.85,30.86) R37.2 ; v1(39.85,30.86) 39.24,30.86 ; v1(39.85,30.86) 39.85,30.25 ; 37.57,109.07 C56.2 ; C56.2 39.19,110.49 ; C56.2 37.57,111.91 ; v1(114.76,84.35) 114.76,84.97 ; v1(114.76,84.35) 114.76,83.74 ; v1(114.76,84.35) 114.15,84.35 ; v1(114.76,84.35) 115.37,84.35 ; C11.2 51.87,66.09 ; C11.2 51.87,64.51 ; 114.22,77.95 v1(114.22,78.56) ; v1(114.22,78.56) 114.22,79.17 ; v1(114.22,78.56) 114.84,78.56 ; v1(114.22,78.56) 113.61,78.56 ; 61.29,39.47 U6.2 ; U6.2 61.29,41.61 ; U6.2 62.36,40.54 ; U6.2 60.22,40.54 ; v1(25.22,89.53) 25.22,90.15 ; v1(25.22,89.53) R46.1 ; v1(25.22,89.53) 25.22,88.92 ; v1(25.22,89.53) 25.83,89.53 ; 126.52,74.24 J1.20 ; J1.20 127.56,75.29 ; J1.20 126.52,76.33 ; J1.20 125.47,75.29 ; 46,33.86 C27.2 ; C27.2 v1(48.44,33.86) ; C27.2 46.79,33.14 ; U5.13 47.47,49.25 ; U5.13 46.4,48.18 ; U5.13 48.54,48.18 ; U5.13 47.47,47.11 ; v1(39.62,65.23) 39.62,65.84 ; v1(39.62,65.23) 40.24,65.23 ; R46.1 23.47,90.54 ; R46.1 23.47,88.53 ; R46.1 22.16,89.53 ; v1(103.89,47.73) 103.27,47.73 ; v1(103.89,47.73) 103.89,47.11 ; 53.19,61.78 C12.2 ; C12.2 54.13,63.09 ; C12.2 52.25,63.09 ; v1(66.73,82.32) 66.73,82.93 ; v1(66.73,82.32) 66.11,82.32 ; v1(66.73,82.32) 66.73,81.71 ; v1(66.73,82.32) 67.34,82.32 ; J1.12 126.52,66.17 ; J1.12 125.47,65.13 ; J1.12 127.56,65.13 ; J1.12 126.52,64.08 ; R37.2 40.64,32.41 ; R37.2 39.06,32.41 ; v1(20.65,60.35) 20.04,60.35 ; v1(20.65,60.35) 21.26,60.35 ; v1(20.65,60.35) 20.65,59.74 ; v1(48.44,33.86) 48.44,34.47 ; v1(48.44,33.86) 49.05,33.86 ; v1(48.44,33.86) 48.44,33.25 ; U21.4 101.93,98.21 ; U21.4 100.67,96.95 ; U21.4 103.19,96.95 ; U21.4 101.93,95.69 ; 63.83,39.47 U6.3 ; U6.3 64.9,40.54 ; U6.3 62.76,40.54 ; U6.3 63.83,41.61 ; R16.1 v1(75.9,53.04) ; R16.1 75.11,54.48 ; R16.1 76.69,54.48 ; v1(75.9,53.04) 75.28,53.04 ; v1(75.9,53.04) 76.51,53.04 ; v1(75.9,53.04) 75.9,52.42 ; C41.2 13.18,71.41 ; C41.2 13.18,68.79 ; C41.2 12.24,70.1 ; 104.65,42.35 U10.5 ; U10.5 105.91,43.61 ; U10.5 104.65,44.87 ; U10.5 103.39,43.61 ; J1.2 126.52,53.47 ; J1.2 127.56,52.43 ; J1.2 125.47,52.43 ; J1.2 126.52,51.38 ; 37.31,33.47 v1(37.31,34.09) ; v1(37.31,34.09) 37.92,34.09 ; v1(37.31,34.09) 36.7,34.09 ; v1(37.31,34.09) R36.2 ; R21.1 33.68,52.15 ; R21.1 34.39,51.36 ; 43.51,87.4 v1(44.12,87.4) ; v1(44.12,87.4) 44.12,86.79 ; v1(44.12,87.4) 44.73,87.4 ; v1(44.12,87.4) 44.12,88.01 ; C15.2 87.22,60.58 ; C15.2 88.16,61.89 ; v1(119.18,83.06) 119.79,83.06 ; v1(119.18,83.06) 118.56,83.06 ; v1(119.18,83.06) 119.18,83.67 ; v1(119.18,83.06) 119.18,82.45 ; 75.41,50.26 C20.2 ; C20.2 75.41,51.84 ; 107.01,95.69 U21.5 ; U21.5 107.01,98.21 ; U21.5 105.75,96.95 ; U21.5 108.27,96.95 ; v1(63.55,64.69) 63.55,65.31 ; v1(63.55,64.69) 62.94,64.69 ; R13.1 47.27,67.06 ; R13.1 45.69,67.06 ; 126.52,61.54 J1.10 ; J1.10 125.47,62.59 ; J1.10 127.56,62.59 ; J1.10 126.52,63.63 ; R35.2 35.56,35.71 ; R35.2 33.98,35.71 ; 32.18,69.36 v1(32.18,69.98) ; v1(32.18,69.98) 31.57,69.98 ; v1(32.18,69.98) 32.18,70.59 ; v1(32.18,69.98) R5.1 ; 59.47,73.61 v1(59.47,74.22) ; v1(59.47,74.22) 59.47,74.83 ; v1(59.47,74.22) 60.09,74.22 ; v1(59.47,74.22) 58.86,74.22 ; 81.99,85.65 v1(82.6,85.65) ; v1(82.6,85.65) 82.6,85.04 ; v1(82.6,85.65) 82.6,86.26 ; v1(82.6,85.65) 83.21,85.65 ; R5.1 34.57,69.98 ; R5.1 33.78,70.69 ; v1(77.6,33.78) 77.6,34.39 ; v1(77.6,33.78) C28.2 ; v1(77.6,33.78) 78.21,33.78 ; v1(77.6,33.78) 77.6,33.17 ; 98.31,43.61 U10.4 ; U10.4 99.57,44.87 ; U10.4 99.57,42.35 ; U10.4 100.83,43.61 ; v1(33.83,74.9) 33.83,75.52 ; v1(33.83,74.9) 33.22,74.9 ; v1(33.83,74.9) 33.83,74.29 ; C28.2 75.18,33.78 ; C28.2 75.97,33.07 ; R36.2 38.1,35.71 ; R36.2 36.52,35.71 ; 35.89,83.29 U11.2 36.88,84.28
  TOP w0.762: U11.15 15.57,98.33 15.54,98.3 15.54,97.23 12.65,94.34 C36.2 12.65,90.53 15.54,87.63 15.54,85.49 15.57,85.47 U11.10 ; U11.3 U11.2 35.89,85.47 35.81,85.54 C35.2 ; R51.2 v1(16.76,69.11) ; C40.2 v1(14.94,77.8) ; C41.2 v1(14.78,70.1) ; C56.2 v1(34.52,110.49)
  GROUND w0.305: v1(32.18,69.98) 32.79,69.98 ; v1(32.18,69.98) 31.57,69.98 ; v1(32.18,69.98) 32.18,70.59 ; v1(32.18,69.98) 32.18,69.36 ; 26.14,61.49 v1(26.14,62.1) ; v1(26.14,62.1) 26.75,62.1 ; v1(26.14,62.1) 26.14,62.72 ; v1(26.14,62.1) 25.52,62.1 ; J1.4 127.56,54.97 ; J1.4 126.52,56.01 ; J1.4 126.52,53.92 ; J1.4 125.47,54.97 ; 125.47,75.29 J1.20 ; J1.20 127.56,75.29 ; J1.20 126.52,74.24 ; J1.20 126.52,76.33 ; 82.6,85.04 v1(82.6,85.65) ; v1(82.6,85.65) 81.99,85.65 ; v1(82.6,85.65) 82.6,86.26 ; v1(82.6,85.65) 83.21,85.65 ; U17.4 30.15,118.11 ; U17.4 27.94,120.32 ; U17.4 27.94,115.9 ; U17.4 25.73,118.11 ; J1.6 126.52,58.55 ; J1.6 125.47,57.51 ; J1.6 127.56,57.51 ; J1.6 126.52,56.46 ; v1(63.55,64.69) 64.16,64.69 ; v1(63.55,64.69) 63.55,65.31 ; v1(63.55,64.69) 63.55,64.08 ; v1(63.55,64.69) 62.94,64.69 ; 34.52,109.88 v1(34.52,110.49) ; v1(34.52,110.49) 35.13,110.49 ; v1(34.52,110.49) 34.52,111.1 ; v1(34.52,110.49) 33.91,110.49 ; U21.5 107.01,98.21 ; U21.5 107.01,95.69 ; U21.5 105.75,96.95 ; U21.5 108.27,96.95 ; 104.65,37.27 U10.2 ; U10.2 103.39,38.53 ; U10.2 105.91,38.53 ; U10.2 104.65,39.79 ; 125.47,70.21 J1.16 ; J1.16 126.52,71.25 ; J1.16 126.52,69.16 ; J1.16 127.56,70.21 ; v1(16.76,69.11) 16.76,69.73 ; v1(16.76,69.11) 16.15,69.11 ; v1(16.76,69.11) 16.76,68.5 ; v1(16.76,69.11) 17.38,69.11 ; U5.16 39.85,49.19 ; U5.16 38.85,48.18 ; U5.16 40.86,48.18 ; U5.16 39.85,47.18 ; 42.82,77.34 v1(42.82,77.95) ; v1(42.82,77.95) 43.44,77.95 ; v1(42.82,77.95) 42.82,78.56 ; v1(42.82,77.95) 42.21,77.95 ; 27.12,56.54 v1(27.74,56.54) ; v1(27.74,56.54) 27.74,57.15 ; v1(27.74,56.54) 28.35,56.54 ; v1(27.74,56.54) 27.74,55.93 ; 14.78,69.49 v1(14.78,70.1) ; v1(14.78,70.1) 15.39,70.1 ; v1(14.78,70.1) 14.17,70.1 ; v1(14.78,70.1) 14.78,70.72 ; v1(46.86,74.9) 47.48,74.9 ; v1(46.86,74.9) 46.86,75.52 ; v1(46.86,74.9) 46.86,74.29 ; v1(46.86,74.9) 46.25,74.9 ; 105.75,91.87 U21.2 ; U21.2 108.27,91.87 ; U21.2 107.01,90.61 ; U21.2 107.01,93.13 ; U21.3 103.19,91.87 ; U21.3 101.93,93.13 ; U21.3 101.93,90.61 ; U21.3 100.67,91.87 ; U5.15 42.39,49.19 ; U5.15 43.4,48.18 ; U5.15 42.39,47.18 ; U5.15 41.39,48.18 ; 24.61,89.53 v1(25.22,89.53) ; v1(25.22,89.53) 25.83,89.53 ; v1(25.22,89.53) 25.22,90.15 ; v1(25.22,89.53) 25.22,88.92 ; 61.29,47.15 U6.19 ; U6.19 61.29,49.16 ; U6.19 62.3,48.16 ; U6.19 60.28,48.16 ; U6.4 67.38,40.54 ; U6.4 65.36,40.54 ; U6.4 66.37,41.54 ; U6.4 66.37,39.53 ; 126.52,71.7 J1.18 ; J1.18 125.47,72.75 ; J1.18 127.56,72.75 ; J1.18 126.52,73.79 ; 101.88,65.22 v1(101.88,65.84) ; v1(101.88,65.84) 101.27,65.84 ; v1(101.88,65.84) 101.88,66.45 ; v1(101.88,65.84) 102.49,65.84 ; 75.9,52.42 v1(75.9,53.04) ; v1(75.9,53.04) 75.9,53.65 ; v1(75.9,53.04) 75.28,53.04 ; v1(75.9,53.04) 76.51,53.04 ; U5.13 47.47,49.19 ; U5.13 48.48,48.18 ; U5.13 46.47,48.18 ; U5.13 47.47,47.18 ; v1(44.12,87.4) 44.73,87.4 ; v1(44.12,87.4) 44.12,86.79 ; v1(44.12,87.4) 44.12,88.01 ; v1(44.12,87.4) 43.51,87.4 ; J1.12 126.52,66.17 ; J1.12 126.52,64.08 ; J1.12 127.56,65.13 ; J1.12 125.47,65.13 ; 90.86,57.72 U9.4 ; U9.4 90.86,60.24 ; U9.4 92.12,58.98 ; U9.4 89.6,58.98 ; 60.28,40.54 U6.2 ; U6.2 62.3,40.54 ; U6.2 61.29,41.54 ; U6.2 61.29,39.53 ; 57.57,108.05 U18.1 ; U18.1 58.83,106.79 ; U18.1 58.83,109.31 ; 126.52,66.62 J1.14 ; J1.14 126.52,68.71 ; J1.14 125.47,67.67 ; J1.14 127.56,67.67 ; v1(33.83,74.9) 33.83,75.52 ; v1(33.83,74.9) 33.83,74.29 ; v1(33.83,74.9) 34.44,74.9 ; v1(33.83,74.9) 33.22,74.9 ; 72.39,78.1 v1(72.39,78.71) ; v1(72.39,78.71) 72.39,79.33 ; v1(72.39,78.71) 71.78,78.71 ; v1(72.39,78.71) 73,78.71 ; 125.47,60.05 J1.8 ; J1.8 127.56,60.05 ; J1.8 126.52,61.09 ; J1.8 126.52,59 ; U6.16 69.92,48.16 ; U6.16 68.91,47.15 ; U6.16 68.91,49.16 ; U6.16 67.9,48.16 ; U6.8 76.53,41.54 ; U6.8 77.54,40.54 ; U6.8 75.52,40.54 ; U6.8 76.53,39.53 ; 15.57,83.35 U11.10 ; U11.10 14.65,84.28 ; U11.10 15.57,85.2 ; U11.10 16.49,84.28 ; 103.89,47.11 v1(103.89,47.73) ; v1(103.89,47.73) 104.5,47.73 ; v1(103.89,47.73) 103.89,48.34 ; v1(103.89,47.73) 103.27,47.73 ; v1(114.22,78.56) 114.22,79.17 ; v1(114.22,78.56) 114.22,77.95 ; v1(114.22,78.56) 114.84,78.56 ; v1(114.22,78.56) 113.61,78.56 ; v1(114.76,84.35) 114.76,84.97 ; v1(114.76,84.35) 115.37,84.35 ; v1(114.76,84.35) 114.15,84.35 ; v1(114.76,84.35) 114.76,83.74 ; U11.3 34.27,84.28 ; U11.3 33.35,83.35 ; U11.3 33.35,85.2 ; U11.3 32.43,84.28 ; 65.61,76.12 v1(66.22,76.12) ; v1(66.22,76.12) 66.83,76.12 ; v1(66.22,76.12) 66.22,76.74 ; v1(66.22,76.12) 66.22,75.51 ; 14.94,77.19 v1(14.94,77.8) ; v1(14.94,77.8) 14.94,78.41 ; v1(14.94,77.8) 15.55,77.8 ; v1(14.94,77.8) 14.32,77.8 ; 95.94,52.64 U9.2 ; U9.2 94.68,53.9 ; U9.2 95.94,55.16 ; U9.2 97.2,53.9 ; v1(109.96,91.06) 109.96,91.67 ; v1(109.96,91.06) 110.57,91.06 ; v1(109.96,91.06) 109.34,91.06 ; v1(109.96,91.06) 109.96,90.45 ; v1(77.6,33.78) 78.21,33.78 ; v1(77.6,33.78) 77.6,33.17 ; v1(77.6,33.78) 77.6,34.39 ; v1(77.6,33.78) 76.98,33.78 ; U5.17 38.32,48.18 ; U5.17 36.31,48.18 ; U5.17 37.31,47.18 ; U5.17 37.31,49.19 ; 76.53,47.15 U6.13 ; U6.13 77.54,48.16 ; U6.13 76.53,49.16 ; U6.13 75.52,48.16 ; v1(59.21,86.18) 59.82,86.18 ; v1(59.21,86.18) 59.21,86.79 ; v1(59.21,86.18) 59.21,85.57 ; v1(59.21,86.18) 58.6,86.18 ; 101.27,87.17 v1(101.27,87.78) ; v1(101.27,87.78) 101.88,87.78 ; v1(101.27,87.78) 100.66,87.78 ; v1(101.27,87.78) 101.27,88.39 ; v1(65.61,70.64) 65.61,71.25 ; v1(65.61,70.64) 65,70.64 ; v1(65.61,70.64) 66.22,70.64 ; v1(65.61,70.64) 65.61,70.03 ; U5.18 34.77,49.19 ; U5.18 33.77,48.18 ; U5.18 35.78,48.18 ; U5.18 34.77,47.18 ; U6.18 63.83,49.16 ; U6.18 63.83,47.15 ; U6.18 64.84,48.16 ; U6.18 62.82,48.16 ; 62.82,40.54 U6.3 ; U6.3 63.83,39.53 ; U6.3 63.83,41.54 ; U6.3 64.84,40.54 ; 46.48,65.07 v1(46.48,65.68) ; v1(46.48,65.68) 47.09,65.68 ; v1(46.48,65.68) 46.48,66.3 ; v1(46.48,65.68) 45.87,65.68 ; 15.57,98.59 U11.15 ; U11.15 14.65,99.52 ; U11.15 16.49,99.52 ; U11.15 15.57,100.44 ; 119.18,82.45 v1(119.18,83.06) ; v1(119.18,83.06) 119.79,83.06 ; v1(119.18,83.06) 119.18,83.67 ; v1(119.18,83.06) 118.56,83.06 ; 20.04,60.35 v1(20.65,60.35) ; v1(20.65,60.35) 20.65,59.74 ; v1(20.65,60.35) 21.26,60.35 ; v1(20.65,60.35) 20.65,60.96 ; v1(29.69,32.49) 29.69,33.1 ; v1(29.69,32.49) 29.69,31.87 ; v1(29.69,32.49) 29.08,32.49 ; v1(29.69,32.49) 30.3,32.49 ; v1(102.79,56.54) 102.79,57.15 ; v1(102.79,56.54) 102.18,56.54 ; v1(102.79,56.54) 102.79,55.93 ; v1(102.79,56.54) 103.41,56.54 ; 26.06,51.28 v1(26.67,51.28) ; v1(26.67,51.28) 26.67,50.67 ; v1(26.67,51.28) 26.67,51.89 ; v1(26.67,51.28) 27.28,51.28 ; 52.58,65.3 v1(53.19,65.3) ; v1(53.19,65.3) 53.19,64.69 ; v1(53.19,65.3) 53.8,65.3 ; v1(53.19,65.3) 53.19,65.92 ; 101.93,95.69 U21.4 ; U21.4 101.93,98.21 ; U21.4 100.67,96.95 ; U21.4 103.19,96.95 ; 125.47,52.43 J1.2 ; J1.2 127.56,52.43 ; J1.2 126.52,53.47 ; J1.2 126.52,51.38 ; U6.17 66.37,49.16 ; U6.17 66.37,47.15 ; U6.17 67.38,48.16 ; U6.17 65.36,48.16 ; 68.91,39.53 U6.5 ; U6.5 69.92,40.54 ; U6.5 68.91,41.54 ; U6.5 67.9,40.54 ; 37.31,33.47 v1(37.31,34.09) ; v1(37.31,34.09) 36.7,34.09 ; v1(37.31,34.09) 37.92,34.09 ; v1(37.31,34.09) 37.31,34.7 ; v1(101.73,71.02) 101.73,71.63 ; v1(101.73,71.02) 101.11,71.02 ; v1(101.73,71.02) 101.73,70.41 ; v1(101.73,71.02) 102.34,71.02 ; 31.62,31.85 v1(31.62,32.46) ; v1(31.62,32.46) 31.01,32.46 ; v1(31.62,32.46) 32.24,32.46 ; v1(31.62,32.46) 31.62,33.07 ; U9.5 97.2,58.98 ; U9.5 94.68,58.98 ; U9.5 95.94,57.72 ; U9.5 95.94,60.24 ; v1(100.69,48.87) 101.3,48.87 ; v1(100.69,48.87) 100.07,48.87 ; v1(100.69,48.87) 100.69,48.26 ; v1(100.69,48.87) 100.69,49.48 ; v1(79.48,87.55) 79.48,88.17 ; v1(79.48,87.55) 80.09,87.55 ; v1(79.48,87.55) 79.48,86.94 ; v1(79.48,87.55) 78.86,87.55 ; 103.78,81.31 v1(104.39,81.31) ; v1(104.39,81.31) 105.01,81.31 ; v1(104.39,81.31) 104.39,81.92 ; v1(104.39,81.31) 104.39,80.69 ; U9.3 90.86,55.16 ; U9.3 90.86,52.64 ; U9.3 89.6,53.9 ; U9.3 92.12,53.9 ; U17.2 42.55,119.24 ; U17.2 41.41,118.11 ; U17.2 42.55,116.98 ; U17.2 43.68,118.11 ; 39.24,30.86 v1(39.85,30.86) ; v1(39.85,30.86) 40.46,30.86 ; v1(39.85,30.86) 39.85,30.25 ; v1(39.85,30.86) 39.85,31.47 ; 34.16,34.09 v1(34.77,34.09) ; v1(34.77,34.09) 34.77,33.47 ; v1(34.77,34.09) 35.38,34.09 ; v1(34.77,34.09) 34.77,34.7 ; U10.5 105.91,43.61 ; U10.5 104.65,42.35 ; U10.5 104.65,44.87 ; U10.5 103.39,43.61 ; 84.66,52.35 v1(84.66,52.96) ; v1(84.66,52.96) 84.66,53.57 ; v1(84.66,52.96) 84.05,52.96 ; v1(84.66,52.96) 85.27,52.96 ; 59.47,73.61 v1(59.47,74.22) ; v1(59.47,74.22) 59.47,74.83 ; v1(59.47,74.22) 58.86,74.22 ; v1(59.47,74.22) 60.09,74.22 ; U10.3 99.57,39.79 ; U10.3 98.31,38.53 ; U10.3 99.57,37.27 ; U10.3 100.83,38.53 ; U11.2 35.89,85.2 ; U11.2 34.97,84.28 ; U11.2 35.89,83.35 ; U11.2 36.81,84.28 ; U6.15 72.46,48.16 ; U6.15 71.45,47.15 ; U6.15 71.45,49.16 ; U6.15 70.44,48.16 ; 98.31,43.61 U10.4 ; U10.4 99.57,44.87 ; U10.4 99.57,42.35 ; U10.4 100.83,43.61 ; v1(48.44,33.86) 48.44,34.47 ; v1(48.44,33.86) 48.44,33.25 ; v1(48.44,33.86) 47.83,33.86 ; v1(48.44,33.86) 49.05,33.86 ; JP1.3 56.44,122.1 ; JP1.3 54.99,120.65 ; JP1.3 57.89,120.65 ; JP1.3 56.44,119.2 ; 51.18,83.62 v1(51.79,83.62) ; v1(51.79,83.62) 51.79,83 ; v1(51.79,83.62) 51.79,84.23 ; v1(51.79,83.62) 52.4,83.62 ; v1(75.82,60.96) 76.43,60.96 ; v1(75.82,60.96) 75.82,60.35 ; v1(75.82,60.96) 75.21,60.96 ; v1(75.82,60.96) 75.82,61.57 ; 126.52,61.54 J1.10 ; J1.10 127.56,62.59 ; J1.10 125.47,62.59 ; J1.10 126.52,63.63 ; 66.73,81.71 v1(66.73,82.32) ; v1(66.73,82.32) 67.34,82.32 ; v1(66.73,82.32) 66.11,82.32 ; v1(66.73,82.32) 66.73,82.93 ; 39.62,64.62 v1(39.62,65.23) ; v1(39.62,65.23) 39.62,65.84 ; v1(39.62,65.23) 39.01,65.23 ; v1(39.62,65.23) 40.24,65.23
  BOTTOM w0.305: 78.08,86.76 C50.2 ; C50.2 78.08,88.34 ; C50.2 v1(79.48,87.55) ; U11.10 16.56,84.28 ; U11.10 14.58,84.28 ; U11.10 15.57,85.27 ; U11.10 15.57,83.29 ; v1(48.44,33.86) 49.05,33.86 ; v1(48.44,33.86) 48.44,33.25 ; v1(48.44,33.86) 48.44,34.47 ; v1(48.44,33.86) 47.83,33.86 ; U5.13 47.47,49.25 ; U5.13 46.4,48.18 ; U5.13 48.54,48.18 ; U5.13 48.56,47.09 C21.2 ; U5.13 47.47,47.11 ; 62.76,48.16 U6.18 ; U6.18 63.83,49.23 ; U6.18 64.9,48.16 ; U6.18 63.83,47.09 ; 29.08,32.49 v1(29.69,32.49) ; v1(29.69,32.49) 30.3,32.49 ; v1(29.69,32.49) 29.69,31.87 ; v1(29.69,32.49) 29.69,33.1 ; U10.2 105.91,38.53 ; U10.2 103.39,38.53 ; U10.2 104.65,39.79 ; U10.2 104.65,37.27 ; 109.32,79.88 C63.2 ; C63.2 110.11,78.94 110.49,78.56 C64.2 ; C63.2 110.9,79.88 ; C9.2 v1(44.12,87.4) ; C9.2 45.59,88.19 ; C9.2 45.59,86.61 ; v1(44.12,87.4) 44.12,86.79 ; v1(44.12,87.4) 44.12,88.01 ; v1(44.12,87.4) 43.51,87.4 ; 33.83,74.29 v1(33.83,74.9) ; v1(33.83,74.9) 33.83,75.52 ; v1(33.83,74.9) 33.22,74.9 ; v1(33.83,74.9) 34.44,74.9 ; 31.62,31.85 v1(31.62,32.46) ; v1(31.62,32.46) 32.24,32.46 ; v1(31.62,32.46) 31.01,32.46 ; v1(31.62,32.46) 31.62,33.07 ; 27.12,56.54 v1(27.74,56.54) ; v1(27.74,56.54) 27.74,57.15 ; v1(27.74,56.54) 28.35,56.54 ; v1(27.74,56.54) 27.74,55.93 ; v1(14.94,77.8) 15.55,77.8 ; v1(14.94,77.8) 14.94,77.19 ; v1(14.94,77.8) 14.32,77.8 ; v1(14.94,77.8) 14.94,78.41 ; 59.47,73.61 v1(59.47,74.22) ; v1(59.47,74.22) 59.47,74.83 ; v1(59.47,74.22) 58.86,74.22 ; v1(59.47,74.22) 60.09,74.22 ; v1(59.47,74.22) 60.43,73.27 C7.2 ; v1(59.47,74.22) 58.93,74.76 C44.2 ; 112.32,77.62 C64.2 ; C64.2 v1(114.22,78.56) ; C64.2 112.32,79.5 ; v1(101.27,87.78) 101.27,88.39 ; v1(101.27,87.78) 100.66,87.78 ; v1(101.27,87.78) 101.27,87.17 ; v1(101.27,87.78) R73.2 ; 46.25,74.9 v1(46.86,74.9) ; v1(46.86,74.9) C2.2 ; v1(46.86,74.9) 47.48,74.9 ; v1(46.86,74.9) 46.86,75.52 ; 37.31,47.11 U5.17 ; U5.17 36.24,48.18 ; U5.17 38.38,48.18 ; U5.17 37.31,49.25 ; 25.6,118.11 U17.4 ; U17.4 27.94,115.77 ; U17.4 27.94,120.45 ; U17.4 30.28,118.11 ; J1.4 127.56,54.97 ; J1.4 126.52,53.92 ; J1.4 125.47,54.97 ; J1.4 126.52,56.01 ; 24.83,63.47 C39.2 ; C39.2 v1(26.14,62.1) ; C39.2 26.14,64.42 ; C39.2 28.24,63.47 C38.2 ; v1(34.77,34.09) 35.38,34.09 ; v1(34.77,34.09) 34.77,34.7 ; v1(34.77,34.09) 34.77,33.47 ; v1(34.77,34.09) 34.16,34.09 ; 28.27,62.79 C38.2 ; C38.2 29.06,63.5 ; C38.2 27.48,63.5 ; J1.16 126.52,71.25 ; J1.16 126.52,69.16 ; J1.16 127.56,70.21 ; J1.16 125.47,70.21 ; v1(26.67,51.28) 27.28,51.28 ; v1(26.67,51.28) 26.67,50.67 ; v1(26.67,51.28) 26.67,51.89 ; v1(26.67,51.28) 26.06,51.28 ; 75.82,60.35 v1(75.82,60.96) ; v1(75.82,60.96) 75.21,60.96 ; v1(75.82,60.96) 76.43,60.96 ; v1(75.82,60.96) 75.82,61.57 ; 101.09,67.39 C31.2 ; C31.2 102.67,67.39 ; C31.2 v1(101.88,65.84) ; v1(66.22,76.12) 66.22,76.74 ; v1(66.22,76.12) 66.83,76.12 ; v1(66.22,76.12) 65.61,76.12 ; v1(66.22,76.12) 66.22,75.06 66.7,74.57 C47.2 69.14,74.57 69.42,74.85 C48.2 ; 60.68,85.39 C45.2 ; C45.2 v1(59.21,86.18) ; C45.2 60.68,86.97 ; v1(59.21,86.18) 59.21,86.79 ; v1(59.21,86.18) 58.6,86.18 ; v1(59.21,86.18) 59.21,85.57 ; 39.24,30.86 v1(39.85,30.86) ; v1(39.85,30.86) 39.85,31.47 ; v1(39.85,30.86) 40.46,30.86 ; v1(39.85,30.86) 39.85,30.25 ; U5.16 40.92,48.18 ; U5.16 38.78,48.18 ; U5.16 39.85,47.11 ; U5.16 39.85,49.25 ; U9.2 97.2,53.9 ; U9.2 95.94,55.16 ; U9.2 94.68,53.9 ; U9.2 95.94,52.64 ; 77.67,44.85 C22.2 ; C22.2 77.67,46.43 ; C22.2 77.01,45.64 76.53,46.13 U6.13 ; C2.2 47.81,72.77 ; C2.2 45.95,72.77 45.54,72.36 C1.2 ; C2.2 46.86,71.46 ; 65.3,48.16 U6.17 ; U6.17 67.44,48.16 ; U6.17 66.37,47.09 ; U6.17 66.37,49.23 ; v1(114.76,84.35) 114.76,84.97 ; v1(114.76,84.35) 115.37,84.35 ; v1(114.76,84.35) 114.15,84.35 ; v1(114.76,84.35) 114.76,83.74 ; v1(114.76,84.35) 115.54,83.57 C62.2 ; 65,70.64 v1(65.61,70.64) ; v1(65.61,70.64) 65.61,71.25 ; v1(65.61,70.64) 66.22,70.64 ; v1(65.61,70.64) 65.61,70.03 ; 95.94,57.72 U9.5 ; U9.5 97.2,58.98 ; U9.5 95.94,60.34 95.96,60.37 C29.2 ; U9.5 94.68,58.98 ; J1.14 126.52,68.71 ; J1.14 127.56,67.67 ; J1.14 125.47,67.67 ; J1.14 126.52,66.62 ; v1(101.73,71.02) 102.34,71.02 ; v1(101.73,71.02) C30.2 ; v1(101.73,71.02) 101.73,71.63 ; v1(101.73,71.02) 101.73,70.41 ; 33.35,83.29 U11.3 ; U11.3 33.35,85.27 ; U11.3 32.36,84.28 ; U11.3 34.34,84.28 ; 125.47,60.05 J1.8 ; J1.8 126.52,59 ; J1.8 127.56,60.05 ; J1.8 126.52,61.09 ; 71.45,47.09 U6.15 ; U6.15 70.38,48.16 ; U6.15 72.52,48.16 ; U6.15 71.45,49.23 ; v1(32.18,69.98) 32.79,69.98 ; v1(32.18,69.98) 32.18,70.59 ; v1(32.18,69.98) 32.18,69.36 ; v1(32.18,69.98) 31.57,69.98 ; U21.4 101.93,98.21 ; U21.4 100.67,96.95 ; U21.4 101.93,95.69 ; U21.4 103.19,96.95 ; C13.2 51.79,86.06 ; C13.2 v1(51.79,83.62) ; C13.2 52.5,85.27 ; C30.2 100.03,70.23 ; C30.2 100.03,71.81 ; v1(103.89,47.73) 104.5,47.73 ; v1(103.89,47.73) 103.27,47.73 ; v1(103.89,47.73) 103.89,48.34 ; v1(103.89,47.73) 103.89,47.11 ; 67.84,48.16 U6.16 ; U6.16 68.91,47.09 ; U6.16 68.91,49.23 ; U6.16 69.98,48.16 ; 63.55,64.08 v1(63.55,64.69) ; v1(63.55,64.69) 62.94,64.69 ; v1(63.55,64.69) 64.16,64.69 ; v1(63.55,64.69) 63.55,65.31 ; 125.47,72.75 J1.18 ; J1.18 127.56,72.75 ; J1.18 126.52,73.79 ; J1.18 126.52,71.7 ; 14.78,69.49 v1(14.78,70.1) ; v1(14.78,70.1) 14.17,70.1 ; v1(14.78,70.1) 15.39,70.1 ; v1(14.78,70.1) 14.78,70.72 ; 90.86,57.72 U9.4 ; U9.4 92.12,58.98 ; U9.4 89.6,58.98 ; U9.4 90.86,60.24 ; J1.12 127.56,65.13 ; J1.12 125.47,65.13 ; J1.12 126.52,64.08 ; J1.12 126.52,66.17 ; U10.5 104.65,44.87 ; U10.5 104.65,42.35 ; U10.5 103.39,43.61 ; U10.5 105.91,43.61 ; v1(84.66,52.96) 84.66,53.57 ; v1(84.66,52.96) 84.66,52.35 ; v1(84.66,52.96) 85.27,52.96 ; v1(84.66,52.96) 84.05,52.96 ; v1(100.69,48.87) 100.69,49.48 ; v1(100.69,48.87) 100.07,48.87 ; v1(100.69,48.87) 101.3,48.87 ; v1(100.69,48.87) 100.69,48.26 ; 33.91,110.49 v1(34.52,110.49) ; v1(34.52,110.49) 34.52,111.1 ; v1(34.52,110.49) 34.52,109.88 ; v1(34.52,110.49) 35.13,110.49 ; v1(37.31,34.09) 37.92,34.09 ; v1(37.31,34.09) 37.31,34.7 ; v1(37.31,34.09) 36.7,34.09 ; v1(37.31,34.09) 37.31,33.47 ; 125.47,57.51 J1.6 ; J1.6 126.52,58.55 ; J1.6 126.52,56.46 ; J1.6 127.56,57.51 ; C51.2 v1(82.6,85.65) ; C51.2 81.13,86.44 ; C51.2 81.13,84.86 ; v1(82.6,85.65) 82.6,86.26 ; v1(82.6,85.65) 83.21,85.65 ; v1(82.6,85.65) 82.6,85.04 ; v1(114.22,78.56) 114.22,79.17 ; v1(114.22,78.56) 114.22,77.95 ; v1(114.22,78.56) 114.84,78.56 ; J1.2 126.52,53.47 ; J1.2 125.47,52.43 ; J1.2 126.52,51.38 ; J1.2 127.56,52.43 ; C49.2 v1(72.39,78.71) ; C49.2 74.02,79.5 ; C49.2 74.02,77.92 ; v1(72.39,78.71) 72.39,78.1 ; v1(72.39,78.71) 72.39,79.33 ; v1(72.39,78.71) 71.78,78.71 ; 41.22,118.11 U17.2 ; U21.3 103.19,91.87 ; U21.3 101.93,93.13 ; U21.3 101.93,90.61 ; U21.3 100.67,91.87 ; 118.56,83.06 v1(119.18,83.06) ; v1(119.18,83.06) 119.18,82.45 ; v1(119.18,83.06) C61.2 ; v1(119.18,83.06) 119.79,83.06 ; 51.18,83.62 v1(51.79,83.62) ; v1(51.79,83.62) 52.4,83.62 ; v1(51.79,83.62) 51.79,83 ; v1(16.76,69.11) 17.38,69.11 ; v1(16.76,69.11) 16.76,68.5 ; v1(16.76,69.11) 16.76,69.73 ; v1(16.76,69.11) 16.15,69.11 ; 89.6,53.9 U9.3 ; U9.3 92.12,53.9 ; U9.3 90.86,52.64 ; U9.3 90.86,55.16 ; 68.91,39.47 U6.5 ; U6.5 67.84,40.54 ; U6.5 68.91,41.61 ; U6.5 69.98,40.54 ; 54.76,115.37 C58.1 58.02,115.37 ; 34.77,47.11 U5.18 ; U5.18 34.77,49.25 ; U5.18 35.84,48.18 ; U5.18 33.7,48.18 ; C44.2 58.93,77.52 ; C44.2 58.21,76.73 ; C61.2 119.97,84.45 ; C61.2 118.39,84.45 ; 25.22,88.92 v1(25.22,89.53) ; v1(25.22,89.53) 25.83,89.53 ; v1(25.22,89.53) 24.61,89.53 ; v1(25.22,89.53) 25.22,90.15 ; 48.56,44.78 C21.2 ; C21.2 47.85,45.57 ; JP1.3 56.44,122.16 ; JP1.3 54.92,120.65 ; JP1.3 57.95,120.65 ; U21.5 108.27,96.95 ; U21.5 107.01,95.69 ; U21.5 105.75,96.95 ; U21.5 107.01,98.21 ; 20.04,60.35 v1(20.65,60.35) ; v1(20.65,60.35) 21.26,60.35 ; v1(20.65,60.35) 20.65,60.96 ; v1(20.65,60.35) 20.65,59.74 ; 58.9,100.23 C59.1 ; C59.1 60.53,101.65 ; C59.1 57.27,101.65 ; C29.2 95.96,62.59 ; C29.2 95.25,61.8 ; 68.11,75.9 C48.2 ; C48.2 70.73,75.9 ; C48.2 69.42,76.84 ; U6.8 76.53,41.61 ; U6.8 77.6,40.54 ; U6.8 75.46,40.54 ; U6.8 76.53,39.47 ; 46.48,65.07 v1(46.48,65.68) ; v1(46.48,65.68) 47.09,65.68 ; v1(46.48,65.68) 46.48,66.3 ; v1(46.48,65.68) 45.87,65.68 ; 44.37,77.16 C8.2 ; C8.2 v1(42.82,77.95) ; C8.2 44.37,78.74 ; U6.3 64.9,40.54 ; U6.3 63.83,41.61 ; U6.3 62.76,40.54 ; U6.3 63.83,39.47 ; 98.31,38.53 U10.3 ; U10.3 99.57,39.79 ; U10.3 100.83,38.53 ; U10.3 99.57,37.27 ; 77.6,33.17 v1(77.6,33.78) ; v1(77.6,33.78) 76.98,33.78 ; v1(77.6,33.78) 78.21,33.78 ; v1(77.6,33.78) 77.6,34.39 ; 52.58,65.3 v1(53.19,65.3) ; v1(53.19,65.3) 53.19,64.69 ; v1(53.19,65.3) 53.8,65.3 ; v1(53.19,65.3) 53.19,65.92 ; 59.11,68.93 C6.2 ; C6.2 59.82,69.72 60.43,70.33 C7.2 ; C6.2 59.11,70.51 ; U11.2 35.89,85.27 ; U11.2 35.89,83.29 ; U11.2 34.9,84.28 ; U11.2 36.88,84.28 ; 126.52,61.54 J1.10 ; J1.10 127.56,62.59 ; J1.10 126.52,63.63 ; J1.10 125.47,62.59 ; U21.2 107.01,93.13 ; U21.2 107.01,90.61 ; U21.2 105.75,91.87 ; U21.2 108.27,91.87 ; 48.26,116.94 C54.2 48.26,118.82 ; U10.4 99.57,44.87 ; U10.4 98.31,43.61 ; U10.4 99.57,42.35 ; U10.4 100.83,43.61 ; 42.21,77.95 v1(42.82,77.95) ; v1(42.82,77.95) 42.82,77.34 ; v1(42.82,77.95) 42.82,78.56 ; 25.52,62.1 v1(26.14,62.1) ; v1(26.14,62.1) 26.75,62.1 ; v1(26.14,62.1) 26.14,61.49 ; 126.52,74.24 J1.20 ; J1.20 126.52,76.33 ; J1.20 125.47,75.29 ; J1.20 127.56,75.29 ; v1(66.73,82.32) 67.34,82.32 ; v1(66.73,82.32) 66.73,81.71 ; v1(66.73,82.32) C46.2 ; v1(66.73,82.32) 66.11,82.32 ; C1.2 46.26,69.88 ; C1.2 45.54,69.09 ; 41.32,48.18 U5.15 ; U5.15 42.39,47.11 ; U5.15 43.46,48.18 ; U5.15 42.39,49.25 ; 101.27,65.84 v1(101.88,65.84) ; v1(101.88,65.84) 101.88,65.22 ; v1(101.88,65.84) 102.49,65.84 ; 59.48,71.86 C7.2 ; C7.2 61.37,71.86 ; v1(39.62,65.23) 39.62,65.84 ; v1(39.62,65.23) 39.62,64.62 ; v1(39.62,65.23) 39.01,65.23 ; v1(39.62,65.23) 40.24,65.23 ; 104.39,80.69 v1(104.39,81.31) ; v1(104.39,81.31) 103.78,81.31 ; v1(104.39,81.31) U20.2 ; 103.05,86.99 R73.2 ; R73.2 103.05,88.57 ; 115.54,81.89 C62.2 ; C62.2 114.83,82.68 ; U6.13 77.6,48.16 ; U6.13 75.46,48.16 ; U6.13 76.53,49.23 ; v1(109.96,91.06) 109.96,91.67 ; v1(109.96,91.06) 110.57,91.06 ; v1(109.96,91.06) C60.2 ; v1(109.96,91.06) 109.34,91.06 ; U6.19 62.36,48.16 ; U6.19 61.29,49.23 ; U6.19 61.29,47.09 ; U6.19 60.22,48.16 ; C46.2 67.44,83.82 ; C46.2 66.73,84.61 ; 66.37,39.47 U6.4 ; U6.4 65.3,40.54 ; U6.4 67.44,40.54 ; U6.4 66.37,41.61 ; 79.48,86.94 v1(79.48,87.55) ; v1(79.48,87.55) 80.09,87.55 ; v1(79.48,87.55) 79.48,88.17 ; v1(75.9,53.04) 75.9,53.65 ; v1(75.9,53.04) 75.9,52.42 ; v1(75.9,53.04) 75.28,53.04 ; v1(75.9,53.04) 76.51,53.04 ; 102.18,56.54 v1(102.79,56.54) ; v1(102.79,56.54) 102.79,57.15 ; v1(102.79,56.54) 103.41,56.54 ; v1(102.79,56.54) 102.79,55.93 ; 15.57,98.53 U11.15 ; U11.15 15.57,100.51 ; U11.15 16.56,99.52 ; U11.15 14.58,99.52 ; U6.2 62.36,40.54 ; U6.2 61.29,41.61 ; U6.2 61.29,39.47 ; U6.2 60.22,40.54 ; 57.57,108.05 U18.1 ; 109.17,89.59 C60.2 ; C60.2 110.75,89.59
  BOTTOM w0.762: C59.1 58.9,106.51 58.83,106.59 U18.1 58.83,109.96 59.97,111.1 C57.1 57.38,112.32 56.39,113.31 C58.1 56.39,118.88 56.44,118.93 JP1.3 53.67,117.88 C54.2 46.18,117.88 45.85,118.21 C55.2 45.03,119.23 43.92,118.11 U17.2
  vias: v2(6.34,119.27) v2(6.34,114.19) v2(6.34,109.11) v2(6.34,104.03) v2(6.34,98.95) v2(6.34,93.87) v2(6.34,88.79) v2(6.34,83.71) v2(6.34,78.63) v2(6.34,73.55) v2(6.34,68.47) v2(6.34,63.39) v2(6.34,58.31) v2(6.34,53.23) v2(6.34,48.15) v2(6.34,43.07) v2(6.34,37.99) v2(6.34,32.91) v2(6.34,27.83) v2(6.34,22.75) v2(6.34,17.67) v2(6.34,12.59) v2(6.34,7.51) v2(11.42,109.11) v2(11.42,104.03) v2(11.42,58.31) v2(11.42,53.23) v2(11.42,48.15) v2(11.42,43.07) v2(11.42,37.99) v2(11.42,32.91) v2(11.42,27.83) v2(11.42,22.75) v2(11.42,7.51) v2(16.5,109.11) v2(16.5,104.03) v2(16.5,73.55) v2(16.5,58.31) v2(16.5,53.23) v2(16.5,48.15) v2(16.5,43.07) v2(16.5,32.91) v2(16.5,27.83) v2(16.5,22.75) v2(16.5,7.51) v2(21.58,119.27) v2(21.58,114.19) v2(21.58,109.11) v2(21.58,104.03) v2(21.58,78.63) v2(21.58,73.55) v2(21.58,68.47) v2(21.58,58.31) v2(21.58,53.23) v2(21.58,48.15) v2(21.58,43.07) v2(21.58,32.91) v2(21.58,27.83) v2(21.58,22.75) v2(21.58,17.67) v2(21.58,12.59) v2(21.58,7.51) v2(26.66,109.11) v2(26.66,104.03) v2(26.66,98.95) v2(26.66,93.87) v2(26.66,83.71) v2(26.66,78.63) v2(26.66,73.55) v2(26.66,53.23) v2(26.66,48.15) v2(26.66,43.07) v2(26.66,37.99) v2(26.66,32.91) v2(26.66,27.83) v2(26.66,22.75) v2(26.66,17.67) v2(26.66,12.59) v2(26.66,7.51) v2(31.74,109.11) v2(31.74,104.03) v2(31.74,93.87) v2(31.74,88.79) v2(31.74,78.63) v2(31.74,73.55) v2(31.74,43.07) v2(31.74,27.83) v2(31.74,22.75) v2(31.74,17.67) v2(31.74,12.59) v2(31.74,7.51) v2(36.82,104.03) v2(36.82,78.63) v2(36.82,53.23) v2(36.82,43.07) v2(36.82,27.83) v2(36.82,22.75) v2(36.82,17.67) v2(36.82,12.59) v2(36.82,7.51) v2(41.9,104.03) v2(41.9,93.87) v2(41.9,88.79) v2(41.9,63.39) v2(41.9,58.31) v2(41.9,53.23) v2(41.9,43.07) v2(41.9,27.83) v2(41.9,22.75) v2(41.9,17.67) v2(41.9,12.59) v2(41.9,7.51) v2(46.98,114.19) v2(46.98,109.11) v2(46.98,98.95) v2(46.98,63.39) v2(46.98,58.31) v2(46.98,53.23) v2(46.98,27.83) v2(46.98,22.75) v2(46.98,17.67) v2(46.98,12.59) v2(46.98,7.51) v2(52.06,104.03) v2(52.06,98.95) v2(52.06,83.71) v2(52.06,58.31) v2(52.06,53.23) v2(52.06,37.99) v2(52.06,32.91) v2(52.06,27.83) v2(52.06,22.75) v2(52.06,17.67) v2(52.06,12.59) v2(52.06,7.51) v2(57.14,104.03) v2(57.14,98.95) v2(57.14,93.87) v2(57.14,88.79) v2(57.14,83.71) v2(57.14,78.63) v2(57.14,63.39) v2(57.14,58.31) v2(57.14,53.23) v2(57.14,37.99) v2(57.14,32.91) v2(57.14,27.83) v2(57.14,22.75) v2(57.14,17.67) v2(57.14,12.59) v2(57.14,7.51) v2(62.22,98.95) v2(62.22,58.31) v2(62.22,53.23) v2(62.22,43.07) v2(62.22,37.99) v2(62.22,32.91) v2(62.22,27.83) v2(62.22,22.75) v2(62.22,17.67) v2(62.22,12.59) v2(62.22,7.51) v2(67.3,119.27) v2(67.3,114.19) v2(67.3,104.03) v2(67.3,98.95) v2(67.3,78.63) v2(67.3,58.31) v2(67.3,53.23) v2(67.3,43.07) v2(67.3,37.99) v2(67.3,32.91) v2(67.3,27.83) v2(67.3,22.75) v2(67.3,17.67) v2(67.3,12.59) v2(67.3,7.51) v2(72.38,119.27) v2(72.38,114.19) v2(72.38,109.11) v2(72.38,104.03) v2(72.38,98.95) v2(72.38,93.87) v2(72.38,88.79) v2(72.38,78.63) v2(72.38,63.39) v2(72.38,43.07) v2(72.38,27.83) v2(72.38,22.75) v2(72.38,17.67) v2(72.38,12.59) v2(72.38,7.51) v2(77.46,119.27) v2(77.46,114.19) v2(77.46,109.11) v2(77.46,104.03) v2(77.46,98.95) v2(77.46,63.39) v2(77.46,43.07) v2(77.46,27.83) v2(77.46,22.75) v2(77.46,17.67) v2(77.46,12.59) v2(77.46,7.51) v2(82.54,119.27) v2(82.54,114.19) v2(82.54,109.11) v2(82.54,104.03) v2(82.54,98.95) v2(82.54,93.87) v2(82.54,78.63) v2(82.54,63.39) v2(82.54,37.99) v2(82.54,32.91) v2(82.54,27.83) v2(82.54,22.75) v2(82.54,17.67) v2(82.54,12.59) v2(82.54,7.51) v2(87.62,119.27) v2(87.62,114.19) v2(87.62,109.11) v2(87.62,104.03) v2(87.62,98.95) v2(87.62,93.87) v2(87.62,88.79) v2(87.62,83.71) v2(87.62,78.63) v2(87.62,63.39) v2(87.62,53.23) v2(87.62,48.15) v2(87.62,43.07) v2(87.62,37.99) v2(87.62,32.91) v2(87.62,27.83) v2(87.62,22.75) v2(87.62,17.67) v2(87.62,12.59) v2(87.62,7.51) v2(92.7,119.27) v2(92.7,114.19) v2(92.7,109.11) v2(92.7,104.03) v2(92.7,98.95) v2(92.7,93.87) v2(92.7,88.79) v2(92.7,83.71) v2(92.7,78.63) v2(92.7,63.39) v2(92.7,48.15) v2(92.7,43.07) v2(92.7,37.99) v2(92.7,32.91) v2(92.7,27.83) v2(92.7,22.75) v2(92.7,17.67) v2(92.7,12.59) v2(92.7,7.51) v2(97.78,119.27) v2(97.78,114.19) v2(97.78,109.11) v2(97.78,104.03) v2(97.78,98.95) v2(97.78,93.87) v2(97.78,88.79) v2(97.78,83.71) v2(97.78,48.15) v2(97.78,32.91) v2(97.78,27.83) v2(97.78,22.75) v2(97.78,17.67) v2(97.78,12.59) v2(97.78,7.51) v2(102.86,119.27) v2(102.86,114.19) v2(102.86,109.11) v2(102.86,104.03) v2(102.86,78.63) v2(102.86,63.39) v2(102.86,58.31) v2(102.86,32.91) v2(102.86,27.83) v2(102.86,22.75) v2(102.86,17.67) v2(102.86,12.59) v2(102.86,7.51) v2(107.94,119.27) v2(107.94,114.19) v2(107.94,109.11) v2(107.94,104.03) v2(107.94,63.39) v2(107.94,58.31) v2(107.94,43.07) v2(107.94,37.99) v2(107.94,32.91) v2(107.94,27.83) v2(107.94,22.75) v2(107.94,17.67) v2(107.94,12.59) v2(107.94,7.51) v2(113.02,109.11) v2(113.02,104.03) v2(113.02,98.95) v2(113.02,93.87) v2(113.02,58.31) v2(113.02,48.15) v2(113.02,43.07) v2(113.02,37.99) v2(113.02,32.91) v2(113.02,27.83) v2(113.02,22.75) v2(113.02,7.51) v2(118.1,109.11) v2(118.1,104.03) v2(118.1,98.95) v2(118.1,93.87) v2(118.1,78.63) v2(118.1,58.31) v2(118.1,48.15) v2(118.1,43.07) v2(118.1,37.99) v2(118.1,32.91) v2(118.1,27.83) v2(118.1,22.75) v2(118.1,7.51) v2(123.18,119.27) v2(123.18,114.19) v2(123.18,109.11) v2(123.18,104.03) v2(123.18,98.95) v2(123.18,83.71) v2(123.18,78.63) v2(123.18,48.15) v2(123.18,43.07) v2(123.18,37.99) v2(123.18,32.91) v2(123.18,27.83) v2(123.18,22.75) v2(123.18,17.67) v2(123.18,12.59) v2(123.18,7.51) v2(128.26,119.27) v2(128.26,114.19) v2(128.26,109.11) v2(128.26,104.03) v2(128.26,98.95) v2(128.26,93.87) v2(128.26,78.63) v2(128.26,48.15) v2(128.26,43.07) v2(128.26,37.99) v2(128.26,32.91) v2(128.26,27.83) v2(128.26,22.75) v2(128.26,17.67) v2(128.26,12.59) v2(128.26,7.51)
